# Altium PCB SensorBoard.PcbDoc (part 1 of 5)
Units mm, origin at the board's own origin, x right, y up, seen from the top; angles counter-clockwise.
Board outline 133.86 x 67.84 mm, 4 copper layers (Top Layer, Power Plane, Ground Plane, Bottom Layer), stack 1.586 mm thick; 244 components, 150 nets, 825 pads, 904 vias.
Unrouted connection lines stored in the file: 43.
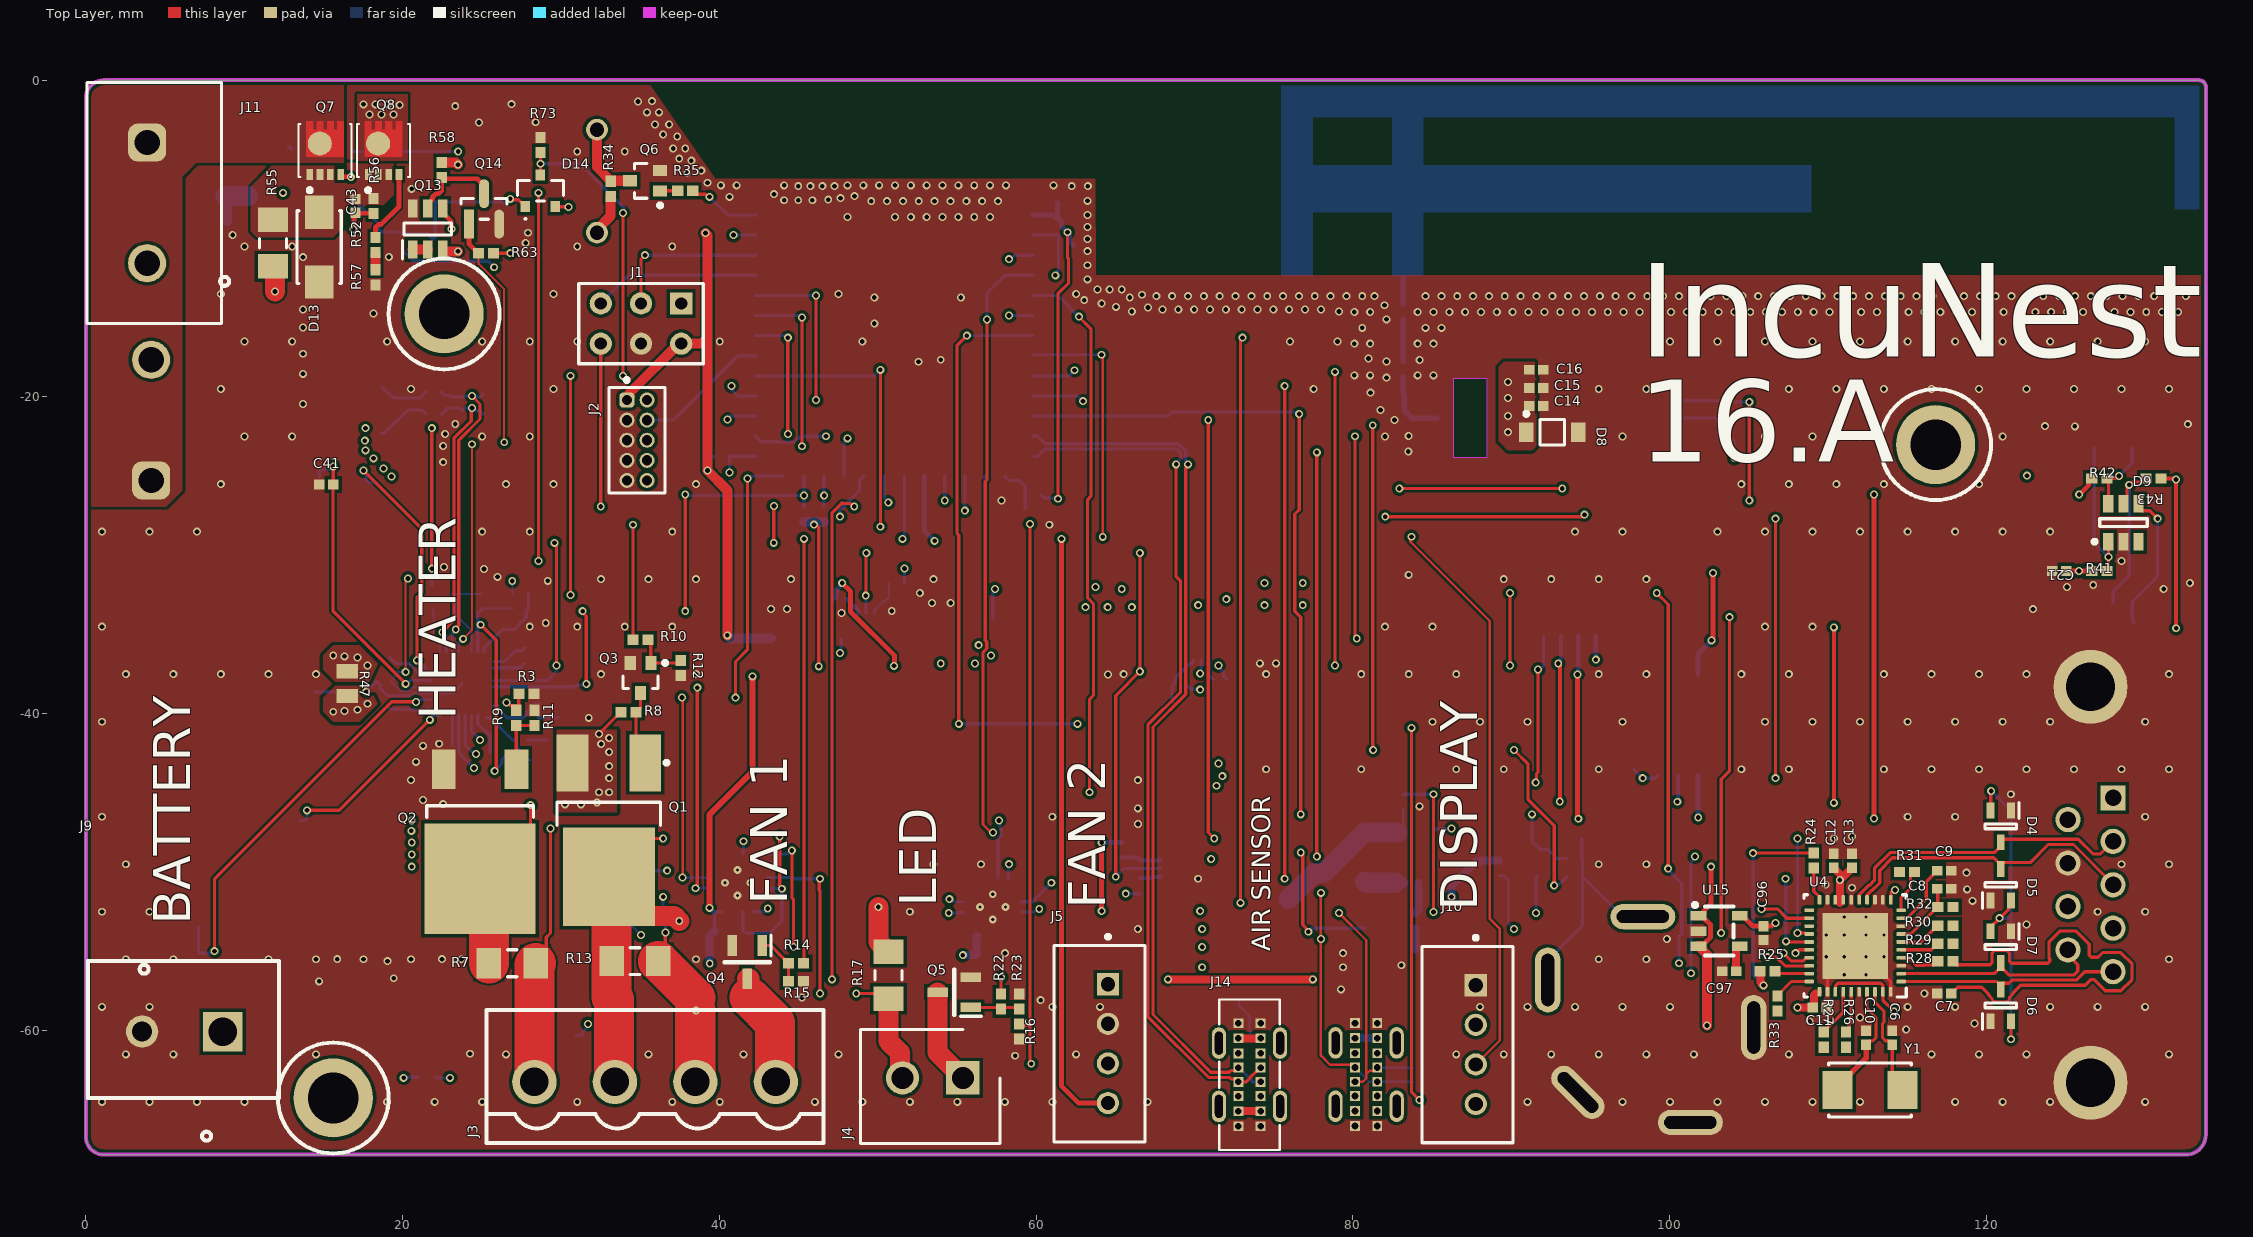
[diagram p0: Top Layer view]
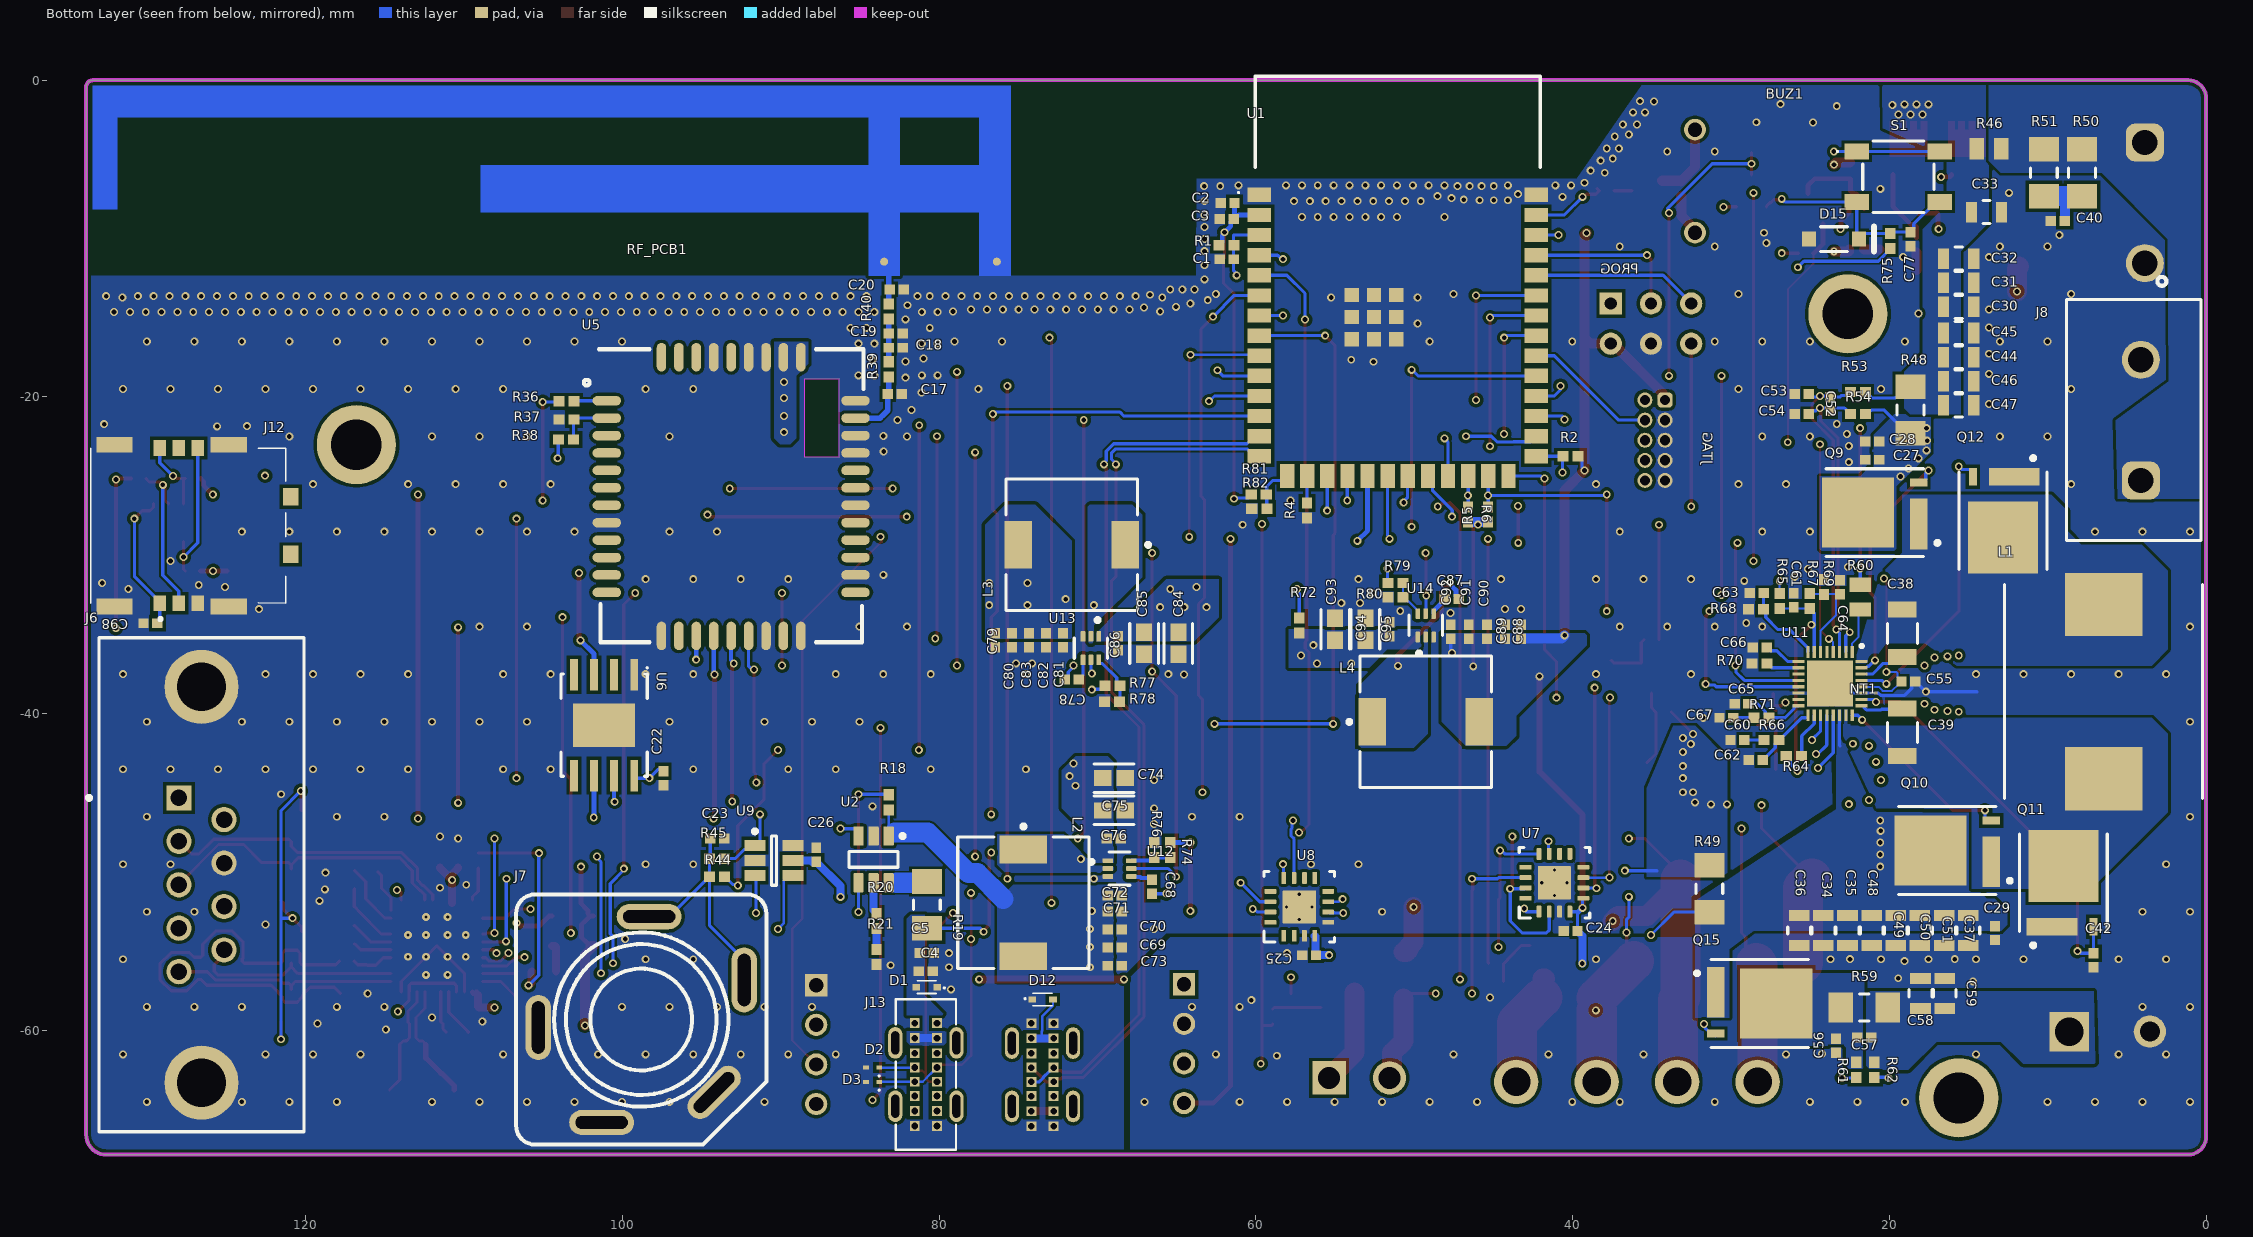
[diagram p1: Bottom Layer view, seen from below]
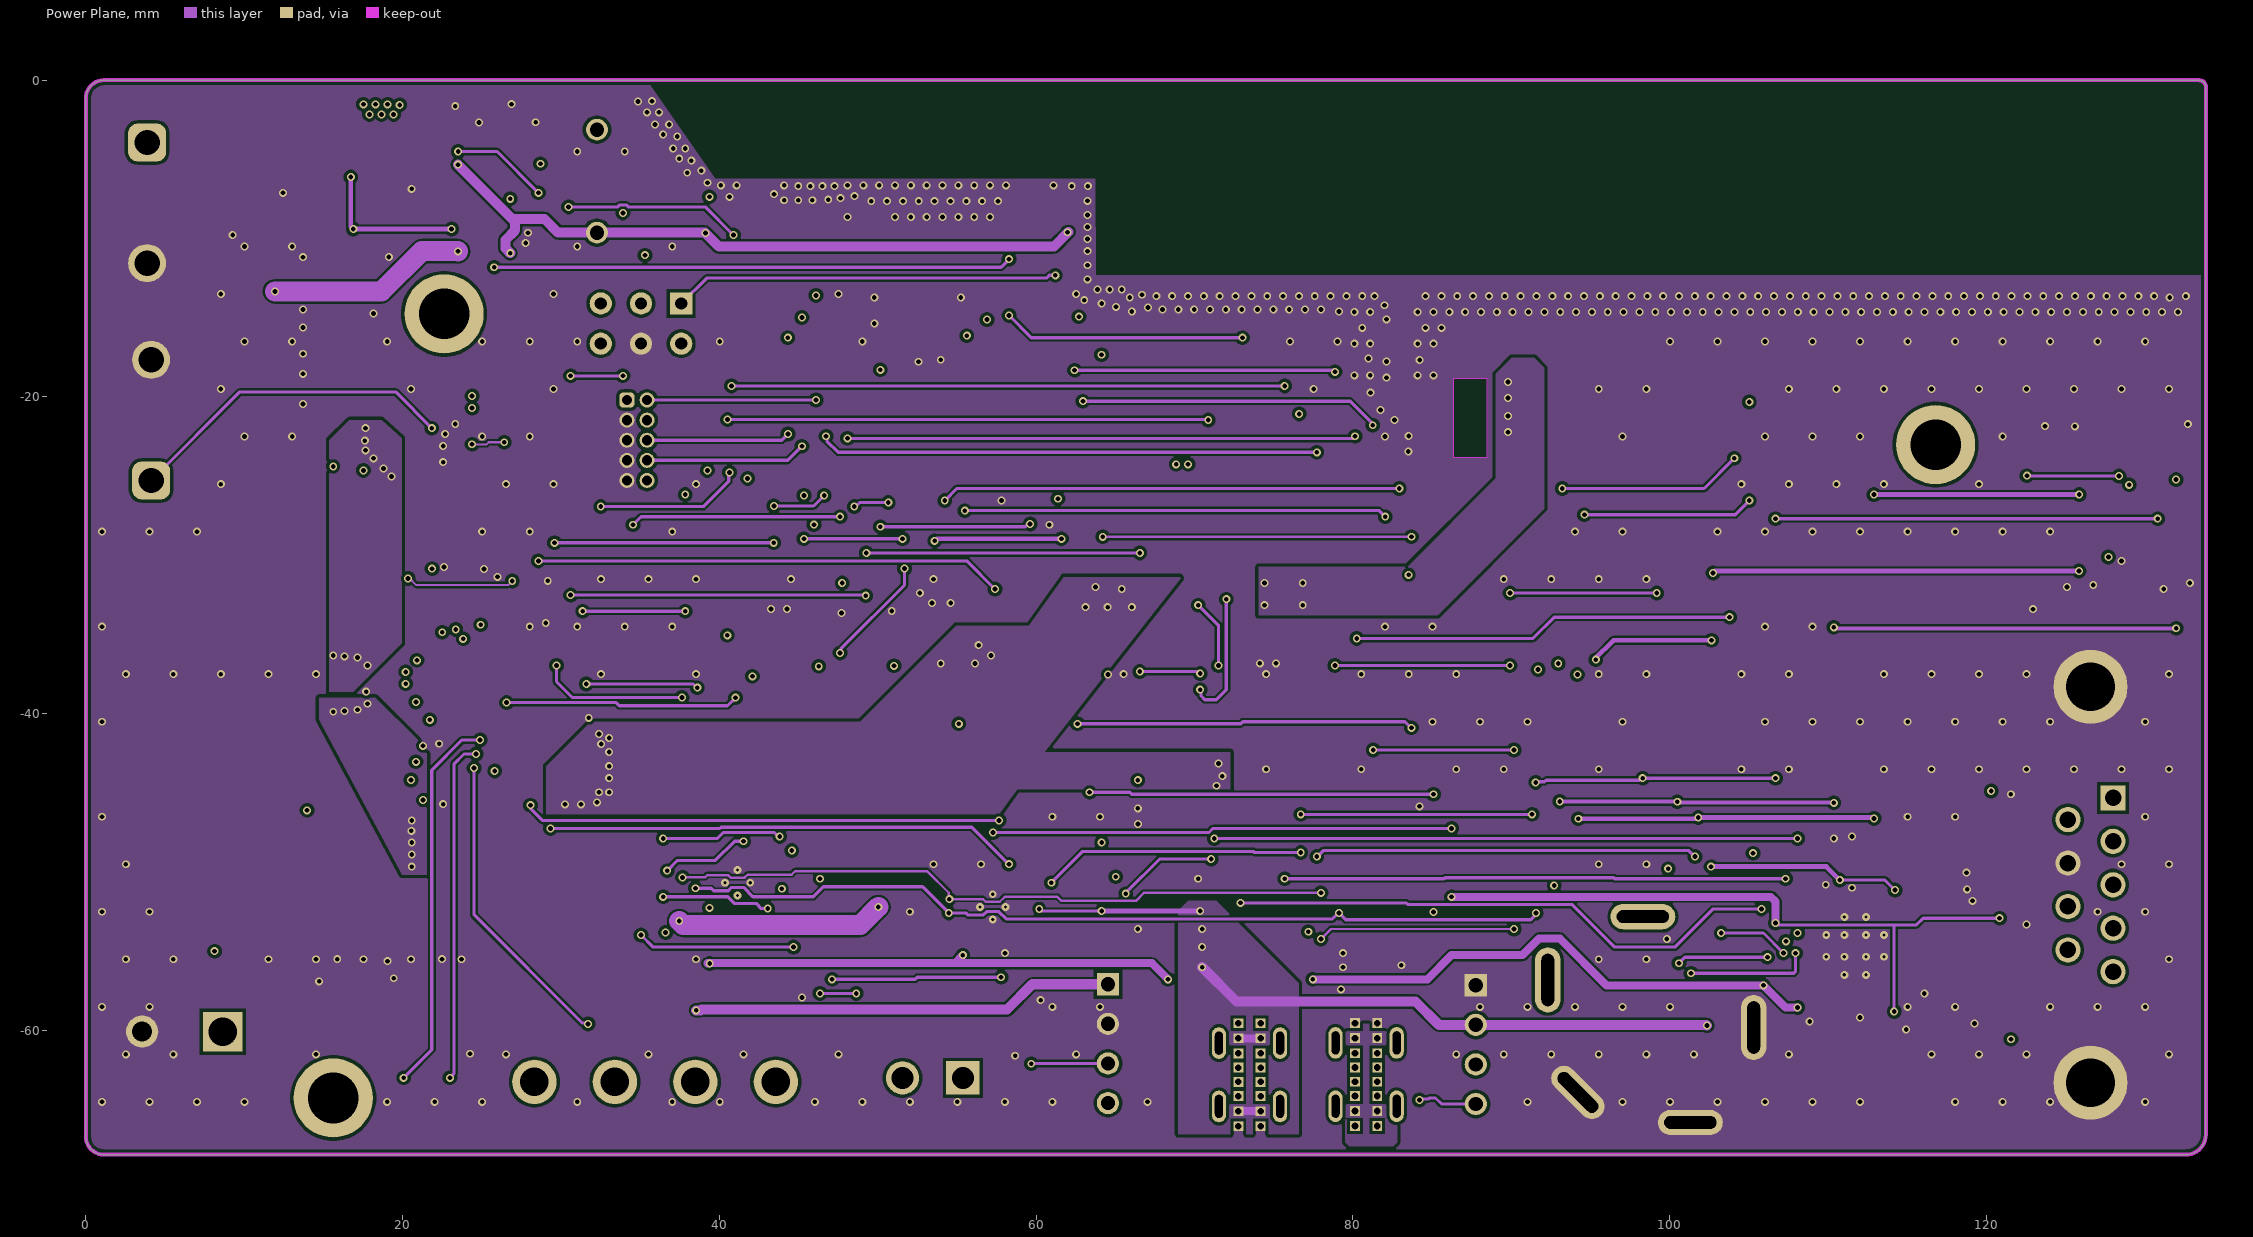
[diagram p2: Power Plane]
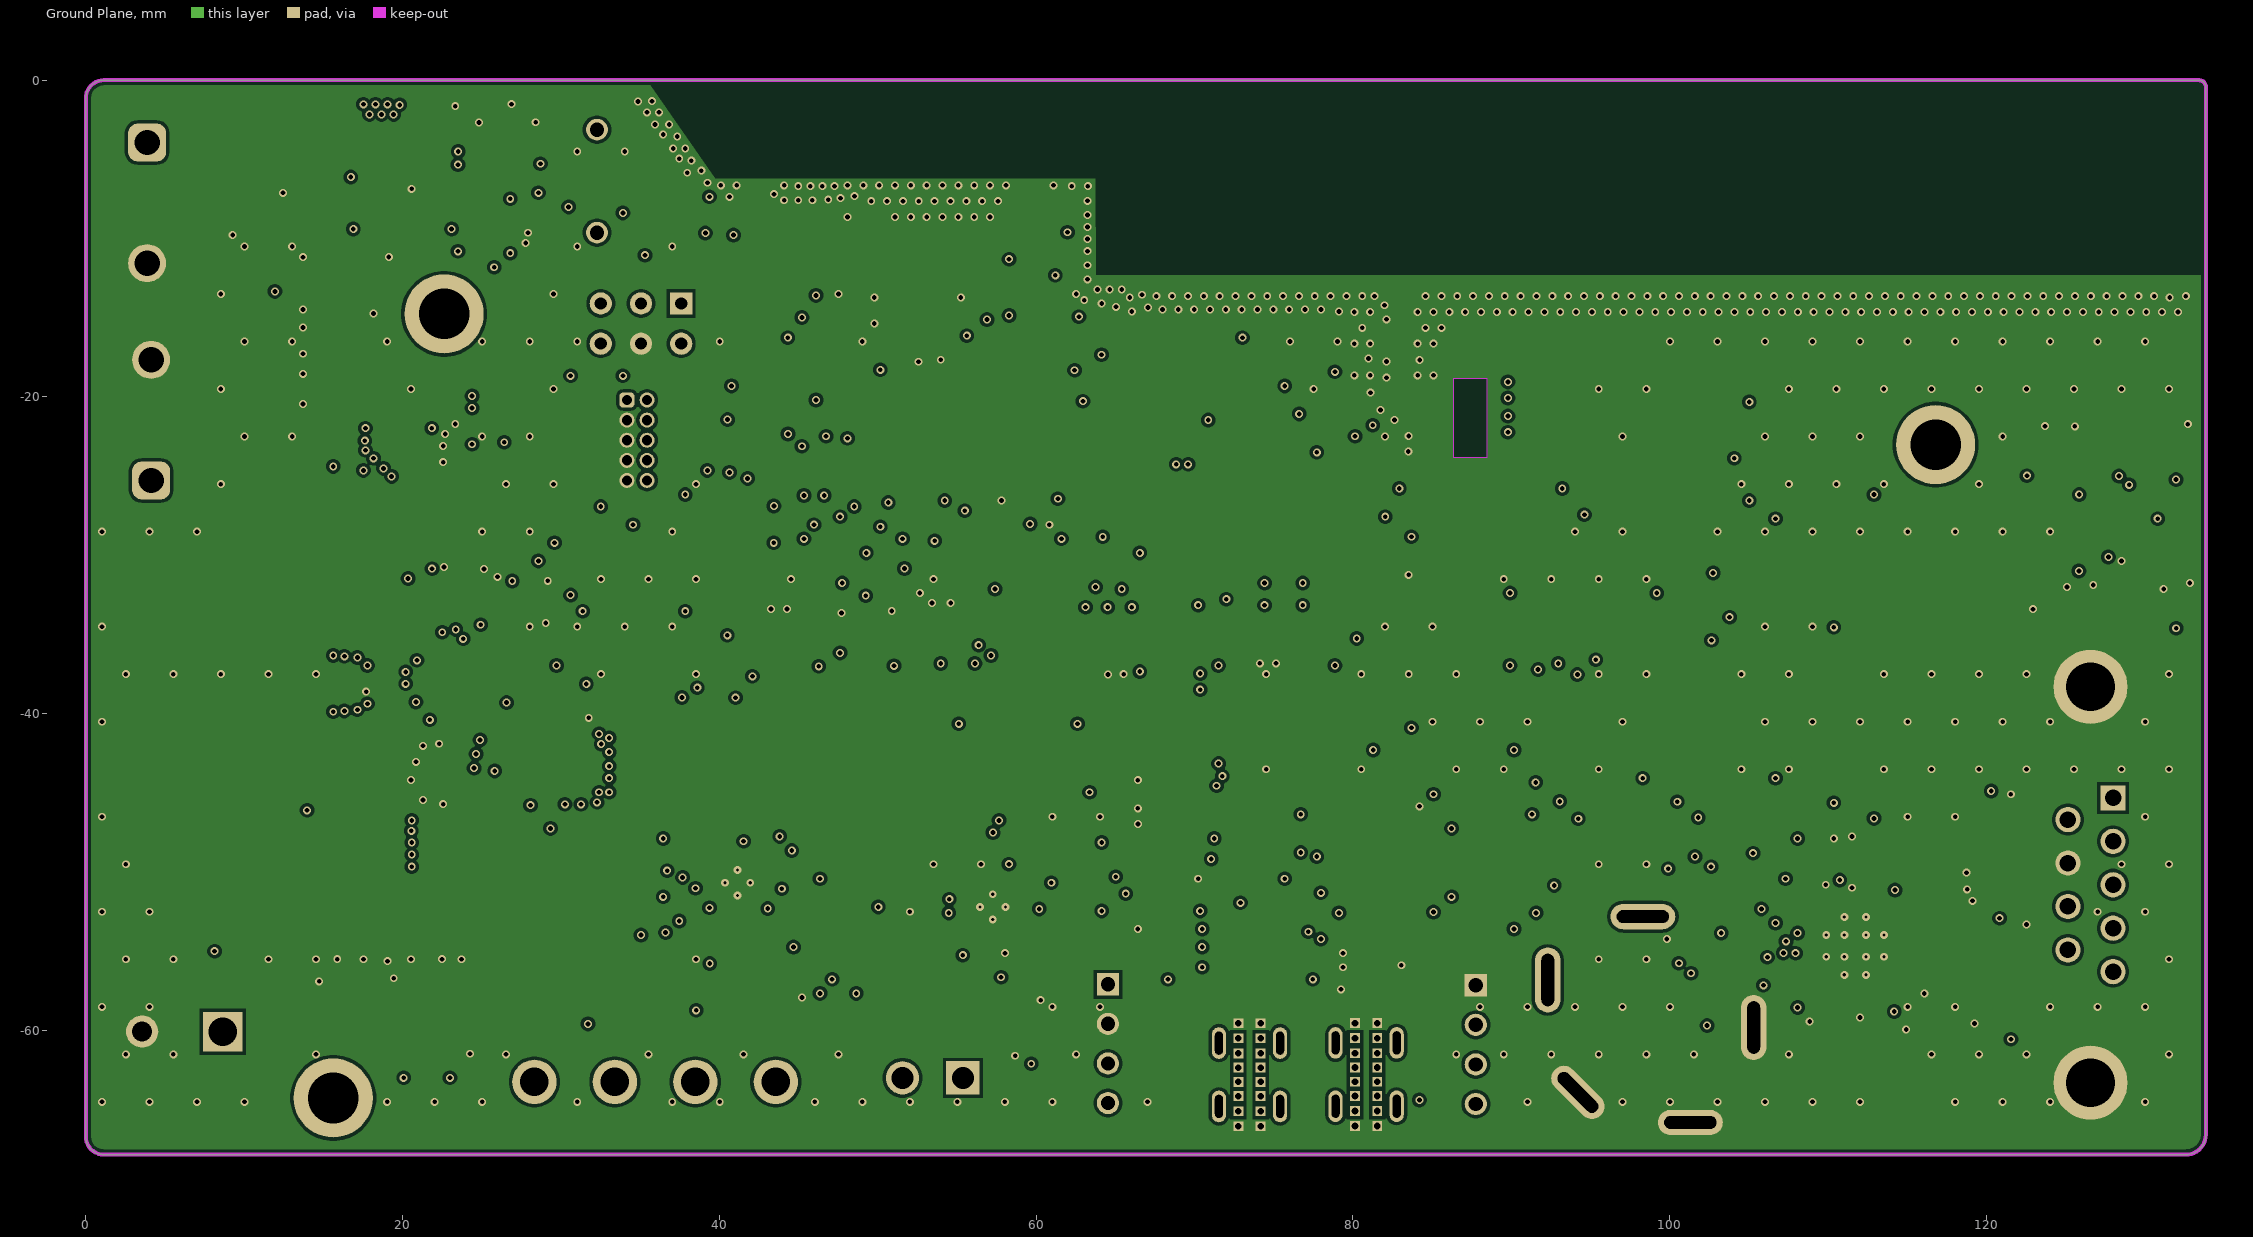
[diagram p3: Ground Plane]
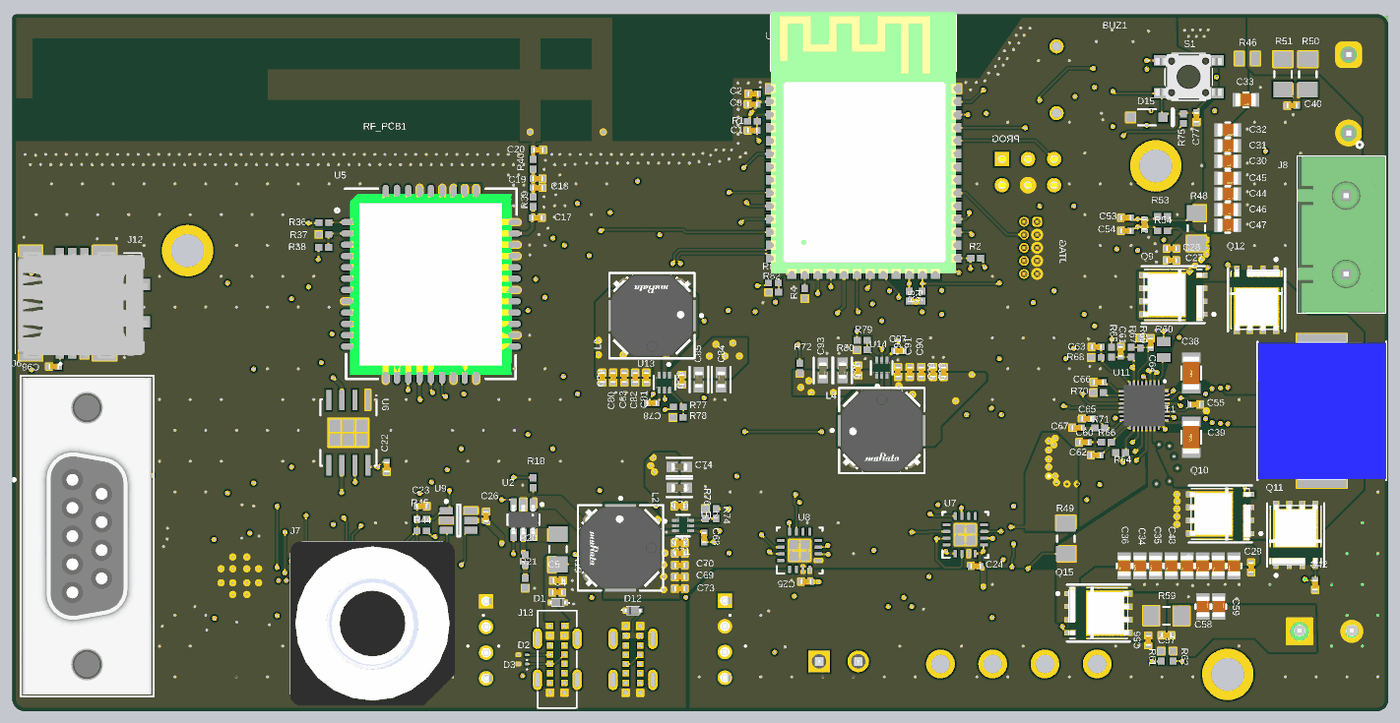
[diagram p6: 3D render of the assembled board from below, using the file's embedded part models]

## Layer stack, top to bottom
Top Solder: solder mask 0.0254, Solder Resist, Dk 3.5
Top Layer: signal copper 0.035
Core1: prepreg 0.2104, FR-4, Dk 3.95
Power Plane: signal copper 0.0152
Core2: core 1.065, FR-4, Dk 3.95
Ground Plane: signal copper 0.0152
Core3: prepreg 0.2104, FR-4, Dk 3.95
Bottom Layer: signal copper 0.035
Bottom Solder: solder mask 0.0254, Solder Resist, Dk 3.5

## Board outline
0,-66.699 0,-1.143 cw(c1.143,-1.143) 1.143,0 133.424,0 cw(c133.424,-0.434) 133.858,-0.434 133.858,-66.572 cw(c132.588,-66.572) 132.588,-67.842 1.143,-67.842 cw(c1.143,-66.699)

## Design rules (kind name [scope] priority, off if disabled: settings)
AssemblyTestPointUsage AssemblyTestPointUsage_1 [All] p2:
AssemblyTestpoint AssemblyTestpoint_1 [All] p2: testpointundercomponent=TRUE minsize=1.016 maxsize=2.54 preferedsize=1.524 minholesize=0 maxholesize=1.016 preferedholesize=0.813 testpointgrid=0.025 usegrid=TRUE gridtolerance=0 allowsidetop=TRUE allowsidebottom=TRUE
Clearance "Board outline clearance" [All vs OnLayer('Keep-Out Layer')] p1: gap=0.2 ignorepadtopadclearanceinfootprint=FALSE except(0: Arc-Hole Track-Hole SMDPad-Hole THPad-Hole Via-Hole Fill-Hole Poly-Hole Region-Hole Text-Hole)
Clearance Clearance_1 [All] p2: gap=0.2 ignorepadtopadclearanceinfootprint=FALSE except(0: Arc-Text Track-Text SMDPad-Text THPad-Text Via-Text Fill-Text Poly-Text Region-Text Text-Text Text-Hole; 0.102: Arc-Arc Arc-Track Arc-SMDPad Track-Track Track-SMDPad; 0.127: Arc-THPad Arc-Via Arc-Fill Arc-Poly Arc-Region Arc-Hole Track-THPad Track-Via Track-Fill Track-Poly Track-Region Track-Hole; 0.152: SMDPad-SMDPad; 0.203: SMDPad-THPad THPad-THPad; 0.254: Via-Via)
ComponentClearance [InComponent('L1')] p1: gap=0 collisioncheckmode=3 verticalgap=0.254 showdistances=FALSE
ComponentClearance UFL [InComponent('RF_CON1')] p2: gap=0 collisioncheckmode=3 verticalgap=0.254 showdistances=FALSE
ComponentClearance ComponentClearance_1 [All] p3: gap=0.254 collisioncheckmode=3 verticalgap=0.254 showdistances=FALSE
DiffPairsRouting DiffPair_USBDiffPairsRouting [InDifferentialPairClass('USB')] p1: maxlimit=0.127 minlimit=0.127 mostfreqgap=0.127 toplayer_minwidth=0.127 toplayer_maxwidth=0.194 toplayer_prefwidth=0.194 midlayer1_minwidth=0.127 midlayer1_maxwidth=0.159 midlayer1_prefwidth=0.159 midlayer2_minwidth=0.127 midlayer2_maxwidth=0.159 midlayer2_prefwidth=0.159 bottomlayer_minwidth=0.127 bottomlayer_maxwidth=0.194 bottomlayer_prefwidth=0.194 impedanceprofiledriven=TRUE impedanceprofileid={170D84A8-33D3-444B-B09E-1C0FCCCC4F91} impedanceprofilevalue=90.000000 maxuncoupledlength=12.7
FabricationTestPointUsage FabricationTestPointUsage_1 [All] p2: valid=0 allowmultiple=FALSE
FabricationTestpoint FabricationTestpoint_1 [All] p2: side=3 testpointundercomponent=TRUE minsize=1.016 maxsize=2.54 preferedsize=1.524 minholesize=0 maxholesize=1.016 preferedholesize=0.813 testpointgrid=0.025 allowsidetop=TRUE allowsidebottom=TRUE usegrid=TRUE gridtolerance=0
FanoutControl Fanout_LCC [IsLCC] p1: bgadir=Out bgaviamode=Centered fanoutstyle=Auto fanoutdirection=Alternating viagrid=0.025 // Fanout_LCC (Default Rule)
FanoutControl Fanout_BGA [IsBGA] p2: bgadir=Out bgaviamode=Centered fanoutstyle=Auto fanoutdirection=Alternating viagrid=0.025 // Fanout_BGA (Default Rule)
FanoutControl Fanout_Small [(CompPinCount < 5)] p3: bgadir=Out bgaviamode=Centered fanoutstyle=Auto fanoutdirection=OutThenIn viagrid=0.025 // Fanout_Small (Default Rule)
FanoutControl Fanout_SOIC [IsSOIC] p4: bgadir=Out bgaviamode=Centered fanoutstyle=Auto fanoutdirection=Alternating viagrid=0.025 // Fanout_SOIC (Default Rule)
FanoutControl Fanout_BGA_1 [IsBGA] p6: bgadir=Out bgaviamode=Centered fanoutstyle=Auto fanoutdirection=Alternating viagrid=0.025 // Fanout_BGA (Default Rule)
FanoutControl Fanout_LCC_1 [IsLCC] p7: bgadir=Out bgaviamode=Centered fanoutstyle=Auto fanoutdirection=Alternating viagrid=0.025 // Fanout_LCC (Default Rule)
FanoutControl Fanout_SOIC_1 [IsSOIC] p8: bgadir=Out bgaviamode=Centered fanoutstyle=Auto fanoutdirection=Alternating viagrid=0.025 // Fanout_SOIC (Default Rule)
FanoutControl Fanout_Small_1 [(CompPinCount < 5)] p9: bgadir=Out bgaviamode=Centered fanoutstyle=Auto fanoutdirection=OutThenIn viagrid=0.025 // Fanout_Small (Default Rule)
FanoutControl Fanout_Default_1 [All] p10: bgadir=Out bgaviamode=Centered fanoutstyle=Auto fanoutdirection=Alternating viagrid=0.025 // Fanout_Default (Default Rule)
Height Height_1 [All] p1: minheight=0 maxheight=50 prefheight=12.7
HoleSize HoleSize_1 [All] p1: absolutevalues=TRUE maxlimit=15 minlimit=0.2 maxpercent=80.000 minpercent=20.000
HoleToHoleClearance u8 [All vs InComponent('u8_1')] p1: gap=0 allowstackedmicrovias=TRUE
HoleToHoleClearance [All] p2: gap=0.254 allowstackedmicrovias=TRUE
LayerPairs LayerPairs_1 [All] p1: enforce=TRUE
MatchedLengths DiffPair_USBMatchedLengths [InDifferentialPairClass('USB')] p1: tolerance=25.4 checknetsindiffpair=FALSE checkdiffpairvsdiffpair=TRUE checkxsignals=TRUE checkothers=TRUE
MinimumAnnularRing [All] p1: minimumring=0.09
MinimumSolderMaskSliver MinimumSolderMaskSliver_1 [All] p1 off: minsoldermaskwidth=0.2
NetAntennae NetAntennae_1 [All] p2: netantennaetolerance=0
PasteMaskExpansion PasteMaskExpansion_1 [All] p2: expansion=0
PlaneClearance PlaneClearance_1 [All] p1: clearance=0.508
PlaneConnect PlaneConnect_1 [All] p1: planeconnectstyle=Direct reliefexpansion=0.508 reliefentries=4 reliefconductorwidth=0.7 reliefairgap=0.254
PolygonConnect Power [All] p1: connectstyle=Direct reliefconductorwidth=2.54 reliefentries=4 polygonreliefangle="90 Angle" airgapwidth=0.254
PolygonConnect Via [IsVia] p2: connectstyle=Direct reliefconductorwidth=0.254 reliefentries=4 polygonreliefangle="90 Angle" airgapwidth=0.254
PolygonConnect [All] p3: connectstyle=Direct reliefconductorwidth=0.508 reliefentries=4 polygonreliefangle="90 Angle" airgapwidth=0.254
RoutingCorners RoutingCorners_1 [All] p2: cornerstyle=45-Degree minsetback=2.54 maxsetback=2.54
RoutingLayers RoutingLayers_1 [All] p2: top layer_v5=TRUE mid layer 1_v5=TRUE mid layer 2_v5=TRUE bottom layer_v5=TRUE
RoutingPriority RoutingPriority_1 [All] p2: routingpriority=0
RoutingTopology RoutingTopology_1 [All] p2: topology=Shortest
RoutingVias RoutingVias_1 [All] p1: holewidth=0.3 width=0.5 viastyle="Through Hole" minholewidth=0.2 minwidth=0.4 maxholewidth=0.711 maxwidth=1.27
ShortCircuit ShortCircuit_Grounds [InNet('PGND') vs InNet('DGND')] p1: allowed=TRUE
ShortCircuit ShortCircuit_Antenna [InNet('NetC20_2')] p2: allowed=TRUE
ShortCircuit [All] p3: allowed=FALSE
SilkToBoardRegionClearance SilkToBoardRegionClearance_1 [InNet('No Net')] p2 off:
SilkToSilkClearance SilkToSilkClearance_1 [All] p1: silktosilkclearance=0
SilkToSolderMaskClearance SilkToSolderMaskClearance_1 [IsPad] p1: minsilkscreentomaskgap=0 clearancetoexposedcopper=TRUE
SolderMaskExpansion [All] p1: expansion=0.102 istentingtop=FALSE
SolderMaskExpansion SolderMaskExpansion_1 [All] p2: expansion=0.102 istentingtop=FALSE
SupplyNets "Schematic Supply Nets_2" [InNet('Vsense+')] p1: voltage=0.000
SupplyNets "Schematic Supply Nets_13" [InNet('4V@2A')] p2: voltage=0.000
SupplyNets "Schematic Supply Nets_12" [InNet('DC_ACTUATORS')] p3: voltage=0.000
SupplyNets "Schematic Supply Nets_11" [InNet('V_SYS')] p4: voltage=0.000
SupplyNets "Schematic Supply Nets_10" [InNet('DGND')] p5: voltage=0.000
SupplyNets "Schematic Supply Nets_9" [InNet('3v3_dig@2A')] p6: voltage=0.000
SupplyNets "Schematic Supply Nets_8" [InNet('V_BAT')] p7: voltage=0.000
SupplyNets "Schematic Supply Nets_7" [InNet('VUSB')] p8: voltage=0.000
SupplyNets "Schematic Supply Nets_6" [InNet('3v3_ANA@250mA')] p9: voltage=0.000
SupplyNets "Schematic Supply Nets_5" [InNet('V_IN')] p10: voltage=0.000
SupplyNets "Schematic Supply Nets_4" [InNet('V_DDA')] p11: voltage=0.000
SupplyNets "Schematic Supply Nets_3" [InNet('5V@2A')] p12: voltage=0.000
SupplyNets "Schematic Supply Nets" [InNet('V_BUS')] p13: voltage=0.000
UnRoutedNet UnRoutedNet_1 [All] p1:
UnpouredPolygon UnpouredPolygon_1 [All] p2:
Width Width_GSM_ANTENNA_1 [InNet('NetC17_2') or InNet('NetC18_2') or InNet('NetC20_2')] p1: maxlimit=0.35 minlimit=0.35 preferedwidth=0.35
Width Width_1 [All] p2: maxlimit=8 minlimit=0.1 preferedwidth=0.2
13 further rules are at their usual default settings.

## Classes and differential pairs
component class U_Display: J10
differential pair class USB: D
component class U_Power_Input: C27 C28 C29 C30 C31 C32 C33 C34 C35 C36 C37 C38 C39 C40 C41 C42 C43 C44 C45 C46 C47 C48 C49 C50 C51 C52 C53 C54 C55 C56 C57 C58 C59 C60 C61 C62 C63 C64 C65 C66 C67 D13 J8 J9 J11 L1 NT1 Q7 Q8 Q9 Q10 Q11 Q12 Q13 Q14 Q15 R46 R47 R48 R49 R50 R51 R52 R53 R54 R55 R56 R57 R58 R59 R60 R61 R62 R63 R64 R65 R66 R67 R68 R69 R70 R71 U11
component class U_GSM: C14 C15 C16 C17 C18 C19 C20 C21 C22 C98 D8 D9 D22 D23 D24 J12 R36 R37 R38 R39 R40 R41 R42 R43 RF_PCB1 U5 U6
differential pair class AFE: IN TX
net class GPRS_RF: NetC17_2 NetC18_2 NetC20_2
component class U_Buzzer: BUZ1 Q6 R34 R35
component class U_AFE: C6 C7 C8 C9 C10 C11 C12 C13 D4 D5 D6 D7 D22 J6 R24 R25 R26 R27 R28 R29 R30 R31 R32 R33 U4 Y1
component class U_Actuators: C4 C5 D1 D2 D3 D20 D21 J3 J4 J5 J13 Q1 Q2 Q3 Q4 Q5 R7 R8 R9 R10 R11 R12 R13 R14 R15 R16 R17 R18 R19 R20 R21 R22 R23 SW1 U2
component class U_sensors: 1 2 3 4 AGND1 C23 C24 C25 C26 D12 DGND1 J7 J14 R44 R45 U7 U8 U9 U18
component class U_power: C68 C69 C70 C71 C72 C73 C74 C75 C76 C77 C78 C79 C80 C81 C82 C83 C84 C85 C86 C87 C88 C89 C90 C91 C92 C93 C94 C95 C96 C97 D14 D15 L2 L3 L4 R72 R73 R74 R75 R76 R77 R78 R79 R80 S1 U12 U13 U14 U15
component class U_uC: C1 C2 C3 J1 J2 R1 R2 R3 R4 R5 R6 R81 R82 U1
differential pair D: +D_P -D_N
differential pair TX: +TX_P -TX_N
differential pair IN: +IN_P -IN_N

## Components (designator, comment, footprint, x,y, rotation, side; value= is the part's Value field where it differs from the comment)
BUZ1 "CUI CMT-1285C-035" BUZZER-12MM-NS 32.273,-6.374 r270 bottom
C1 "1uF 0402 X5R 50V" CAPC1005X55X25NL5T10 61.849,-11.303 r180 bottom
C2 "10uF 0402 X5R 10V" CAPC1005X55X25NL5T10 61.79,-7.747 r180 bottom
C3 "100nF 0402 X7R 50V" CAPC1005X55X25NL5T10 61.849,-8.763 r180 bottom
C4 "10uF 0402 X5R 10V" CAPC1005X55X25NL5T10 80.831,-56.261 r0 bottom
C5 "10uF 0402 X5R 10V" CAPC1005X55X25NL5T10 80.772,-55.118 r0 bottom
C6 "18pF 0402 X5R 50V" CAPC1005X55X25NL5T10 114.049,-60.455 r270 top
C7 "10nF 0402 X7R 50V" CAPC1005X55X25NL5T10 117.348,-57.658 r0 top
C8 "2.2uF 0402 X5R 25V" CAPC1005X55X25NL5T10 117.348,-51.057 r180 top
C9 "2.2uF 0402 X5R 25V" CAPC1005X55X25NL5T10 117.348,-49.914 r180 top
C10 "18pF 0402 X5R 50V" CAPC1005X55X25NL5T10 112.398,-60.455 r270 top
C11 "100nF 0402 X7R 50V" CAPC1005X55X25NL5T10 109.474,-58.547 r180 top
C12 "100nF 0402 X7R 50V" CAPC1005X55X25NL5T10 110.363,-49.276 r270 top
C13 "1uF 0402 X5R 50V" CAPC1005X55X25NL5T10 111.509,-49.279 r270 top
C14 "10uF 0402 X5R 10V" CAPC1005X55X25NL5T10 91.567,-20.574 r180 top
C15 "100nF 0402 X7R 50V" CAPC1005X55X25NL5T10 91.567,-19.431 r180 top
C16 "18pF 0402 X5R 50V" CAPC1005X55X25NL5T10 91.567,-18.288 r180 top
C17 "100nF 0402 X7R 50V" CAPC1005X55X25NL5T10 82.804,-19.812 r0 bottom
C18 "100nF 0402 X7R 50V" CAPC1005X55X25NL5T10 82.745,-16.891 r0 bottom
C19 "100nF 0402 X7R 50V" CAPC1005X55X25NL5T10 82.745,-16.002 r0 bottom
C20 "100nF 0402 X7R 50V" CAPC1005X55X25NL5T10 82.677,-13.208 r0 bottom
C21 "18pF 0402 X5R 50V" CAPC1005X55X25NL5T10 124.587,-30.988 r0 top
C22 "100nF 0402 X7R 50V" CAPC1005X55X25NL5T10 97.409,-44.069 r90 bottom
C23 "100nF 0402 X7R 50V" CAPC1005X55X25NL5T10 94.014,-47.879 r0 bottom
C24 "100nF 0402 X7R 50V" CAPC1005X55X25NL5T10 40.132,-53.721 r180 bottom
C25 "100nF 0402 X7R 50V" CAPC1005X55X25NL5T10 56.642,-55.245 r180 bottom
C26 "100nF 0402 X7R 50V" CAPC1005X55X25NL5T10 87.757,-48.895 r270 bottom
C27 "10nF 0402 X7R 50V" CAPC1005X55X25NL5T10 21.087,-23.962 r180 bottom
C28 "1nF 0402 X7R 50V" CAPC1005X55X25NL5T10 21.09,-22.818 r180 bottom
C29 "10nF 0402 X7R 50V" CAPC1005X55X25NL5T10 13.335,-53.848 r90 bottom
C30 "10uF 0805 X5R 50V" FP-GRM21B-0_2-e0_2_0_7-MFG 15.621,-14.314 r180 bottom
C31 "10uF 0805 X5R 50V" FP-GRM21B-0_2-e0_2_0_7-MFG 15.621,-12.79 r180 bottom
C32 "10uF 0805 X5R 50V" FP-GRM21B-0_2-e0_2_0_7-MFG 15.621,-11.266 r180 bottom
C33 "10uF 0805 X5R 50V" FP-GRM21B-0_2-e0_2_0_7-MFG 13.867,-8.33 r180 bottom
C34 "10uF 0805 X5R 50V" FP-GRM21B-0_2-e0_2_0_7-MFG 24.167,-53.692 r270 bottom
C35 "10uF 0805 X5R 50V" FP-GRM21B-0_2-e0_2_0_7-MFG 22.643,-53.692 r270 bottom
C36 "10uF 0805 X5R 50V" FP-GRM21B-0_2-e0_2_0_7-MFG 25.691,-53.692 r270 bottom
C37 "10uF 0805 X5R 50V" FP-GRM21B-0_2-e0_2_0_7-MFG 15.023,-53.692 r270 bottom
C38 "47nF 1206 X7R 50V" FP-CC1206-FD-MFG 19.177,-34.925 r270 bottom
C39 "47nF 1206 X7R 50V" FP-CC1206-FD-MFG 19.177,-41.172 r90 bottom
C40 "1uF 0402 X5R 50V" CAPC1005X55X25NL5T10 9.359,-8.89 r180 bottom
C41 "150pF 0402 X7R 50V" CAPC1005X55X25NL5T10 15.172,-25.527 r0 top
C42 "150pF 0402 X7R 50V" CAPC1005X55X25NL5T10 7.112,-55.558 r90 bottom
C43 "100nF 0402 X7R 50V" CAPC1005X55X25NL5T10 17.018,-7.942 r90 top
C44 "10uF 0805 X5R 50V" FP-GRM21B-0_2-e0_2_0_7-MFG 15.621,-17.489 r180 bottom
C45 "10uF 0805 X5R 50V" FP-GRM21B-0_2-e0_2_0_7-MFG 15.621,-15.965 r180 bottom
C46 "10uF 0805 X5R 50V" FP-GRM21B-0_2-e0_2_0_7-MFG 15.621,-19.013 r180 bottom
C47 "10uF 0805 X5R 50V" FP-GRM21B-0_2-e0_2_0_7-MFG 15.621,-20.537 r180 bottom
C48 "10uF 0805 X5R 50V" FP-GRM21B-0_2-e0_2_0_7-MFG 21.119,-53.692 r270 bottom
C49 "10uF 0805 X5R 50V" FP-GRM21B-0_2-e0_2_0_7-MFG 19.595,-53.692 r270 bottom
C50 "10uF 0805 X5R 50V" FP-GRM21B-0_2-e0_2_0_7-MFG 18.071,-53.692 r270 bottom
C51 "10uF 0805 X5R 50V" FP-GRM21B-0_2-e0_2_0_7-MFG 16.547,-53.692 r270 bottom
C52 "10nF 0402 X7R 50V" CAPC1005X55X25NL5T10 23.749,-20.447 r90 bottom
C53 "33nF 0402 X7R 50V" CAPC1005X55X25NL5T10 25.527,-19.812 r0 bottom
C54 "33nF 0402 X7R 50V" CAPC1005X55X25NL5T10 25.527,-21.082 r0 bottom
C55 "2.2uF 0402 X5R 25V" CAPC1005X55X25NL5T10 18.796,-37.973 r0 bottom
C56 "1uF 0402 X5R 50V" CAPC1005X55X25NL5T10 23.368,-60.96 r90 bottom
C57 "100nF 0402 X7R 50V" CAPC1005X55X25NL5T10 21.59,-60.452 r0 bottom
C58 "10uF 0805 X5R 50V" FP-GRM21B-0_2-e0_2_0_7-MFG 18.034,-57.658 r90 bottom
C59 "10uF 0805 X5R 50V" FP-GRM21B-0_2-e0_2_0_7-MFG 16.51,-57.658 r90 bottom
C60 "680pF 0402 X5R 50V" CAPC1005X55X25NL5T10 29.591,-41.656 r180 bottom
C61 "1uF 0402 X5R 50V" CAPC1005X55X25NL5T10 26.035,-32.834 r270 bottom
C62 "15pF 0402 X5R 50V" CAPC1005X55X25NL5T10 28.448,-42.926 r180 bottom
C63 "100pF 0402 X7R 50V" CAPC1005X55X25NL5T10 28.382,-32.385 r0 bottom
C64 "100pF 0402 X7R 50V" CAPC1005X55X25NL5T10 23.114,-32.004 r90 bottom
C65 "33pF 0402 X7R 50V" CAPC1005X55X25NL5T10 29.337,-39.37 r0 bottom
C66 "100pF 0402 X7R 50V" CAPC1005X55X25NL5T10 28.194,-35.814 r0 bottom
C67 "4.7 uF 0402 X7R 50V" CAPC1005X55X25NL5T10 30.285,-40.259 r0 bottom
C68 "100nF 0402 X7R 50V" CAPC1005X55X25NL5T10 66.548,-50.927 r90 bottom
C69 "10uF 0402 X5R 10V" CAPC1005X55X25NL5T10 68.915,-54.77 r0 bottom
C70 "10uF 0402 X5R 10V" CAPC1005X55X25NL5T10 68.915,-53.627 r0 bottom
C71 "10uF 0402 X5R 10V" CAPC1005X55X25NL5T10 68.915,-52.484 r0 bottom
C72 "10uF 0402 X5R 10V" CAPC1005X55X25NL5T10 68.915,-51.468 r0 bottom
C73 "100nF 0402 X7R 50V" CAPC1005X55X25NL5T10 68.915,-55.913 r0 bottom
C74 "10uF 0603 X5R 25V" FP-GRM188-0_2-IPC_B 68.961,-44.069 r0 bottom
C75 "10uF 0603 X5R 25V" FP-GRM188-0_2-IPC_B 68.961,-46.101 r0 bottom
C76 "100nF 0402 X7R 50V" CAPC1005X55X25NL5T10 68.961,-47.879 r0 bottom
C77 "100nF 0402 X7R 50V" CAPC1005X55X25NL5T10 18.669,-10.033 r90 bottom
C78 "100nF 0402 X7R 50V" CAPC1005X55X25NL5T10 71.628,-37.846 r180 bottom
C79 "10uF 0402 X5R 10V" CAPC1005X55X25NL5T10 76.454,-35.365 r90 bottom
C80 "10uF 0402 X5R 10V" CAPC1005X55X25NL5T10 75.387,-35.365 r90 bottom
C81 "10uF 0402 X5R 10V" CAPC1005X55X25NL5T10 72.187,-35.365 r90 bottom
C82 "10uF 0402 X5R 10V" CAPC1005X55X25NL5T10 73.254,-35.365 r90 bottom
C83 "100nF 0402 X7R 50V" CAPC1005X55X25NL5T10 74.321,-35.365 r90 bottom
C84 "10uF 0603 X5R 25V" FP-GRM188-0_2-IPC_B 64.897,-35.56 r90 bottom
C85 "10uF 0603 X5R 25V" FP-GRM188-0_2-IPC_B 67.056,-35.56 r90 bottom
C86 "100nF 0402 X7R 50V" CAPC1005X55X25NL5T10 68.707,-35.56 r90 bottom
C87 "100nF 0402 X7R 50V" CAPC1005X55X25NL5T10 47.625,-32.766 r0 bottom
C88 "10uF 0402 X5R 10V" CAPC1005X55X25NL5T10 43.256,-34.823 r270 bottom
C89 "10uF 0402 X5R 10V" CAPC1005X55X25NL5T10 44.272,-34.823 r270 bottom
C90 "10uF 0402 X5R 10V" CAPC1005X55X25NL5T10 45.415,-34.823 r270 bottom
C91 "10uF 0402 X5R 10V" CAPC1005X55X25NL5T10 46.558,-34.823 r270 bottom
C92 "100nF 0402 X7R 50V" CAPC1005X55X25NL5T10 47.701,-34.823 r270 bottom
C93 "10uF 0603 X5R 25V" FP-GRM188-0_2-IPC_B 54.991,-34.671 r270 bottom
C94 "10uF 0603 X5R 25V" FP-GRM188-0_2-IPC_B 53.086,-34.671 r270 bottom
C95 "100nF 0402 X7R 50V" CAPC1005X55X25NL5T10 51.562,-34.671 r270 bottom
C96 "1uF 0402 X5R 50V" CAPC1005X55X25NL5T10 105.918,-53.848 r90 top
C97 "1uF 0402 X5R 50V" CAPC1005X55X25NL5T10 103.759,-56.261 r0 top
C98 "100nF 0402 X7R 50V" CAPC1005X55X25NL5T10 129.794,-34.29 r180 bottom
D1 "LESD5D5.0CT1G" LESD5D50CT1G 80.772,-57.266 r0 bottom
D2 "ESD9B3.3ST5G" ONSC-SOD-923-2-514AB-01_V 84.201,-62.346 r0 bottom
D3 "ESD9B3.3ST5G" ONSC-SOD-923-2-514AB-01_V 84.201,-63.246 r0 bottom
D4 "BAV99W-7-F" SOT65P210X110-3N 120.904,-47.117 r270 top
D5 "BAV99W-7-F" SOT65P210X110-3N 120.904,-50.8 r90 top
D6 "BAV99W-7-F" SOT65P210X110-3N 120.904,-58.42 r90 top
D7 "BAV99W-7-F" SOT65P210X110-3N 120.904,-54.737 r270 top
D8 "MMSZ5231BT1G" ONSC-SOD-123-2-425-04_V 92.583,-22.225 r0 top
D9 "ESDA6V1-5SC6" MF06A_N 128.651,-27.94 r90 top
D12 "LESD5D5.0CT1G" LESD5D50CT1G 73.471,-58.046 r180 bottom
D13 "SMAJ26CA" FP-SMAJ-CA-MFG 14.732,-10.541 r90 top
D14 "BAT54C" NXP-SOT23-3_V 28.702,-6.985 r180 top
D15 "BZT52C3V0-7-F" DIOD-SOD123_V 23.495,-10.033 r180 bottom
J1 "Samtec SLW-103-01-T-D" PCB-37z8hw1ej4f71bosen9e-1 37.592,-14.097 r270 top
J2 "62201021121" 62201021121 34.798,-22.733 r270 top
J3 "KF2EDGVC-5.08-4P" CONN-TH_4P-P5.08_KF2EDGVC-5.08-4P 35.941,-63.246 r180 top
J4 "WJ15EDGVC-3.81-2P" SHDR2W85P0X381_1X2_850X700X935P 55.372,-62.992 r180 top
J5 "B4B-XH-A(LF)(SN)" FP-B4B-XH-A_LF_SN-MFG 64.008,-60.833 r90 top
J6 "2-5747706-0" FP-2-5747706-0-MFG 126.571,-50.8 r90 bottom
J7 "PJ-612" AUDIO-TH_PJ-612 98.806,-59.309 r90 bottom
J8 "691311400102" 691311400102 4.572,-21.463 r90 bottom
J9 "Degson 2EDGK-5.08-02P-14-00AH" PCB-h4cyb3wxd4gf7j132tzl-1 6.096,-60.071 r180 top
J10 "B4B-XH-A(LF)(SN)" FP-B4B-XH-A_LF_SN-MFG 87.232,-60.893 r90 top
J11 "691311400102" 691311400102 4.318,-7.747 r270 top
J12 "1042240820" 1042240820 127,-28.321 r270 bottom
J13 "TYPE-C 16PLC-H10.0" TYPE-C-TH_16PLC-H10.0 80.834,-62.785 r90 bottom
J14 "TYPE-C 16PLC-H10.0" TYPE-C-TH_16PLC-H10.0 73.471,-62.796 r90 top
L1 "SRP1265A-3R3M" INDPM135125X650N 6.477,-38.608 r270 bottom
L2 "1217AS-H-3R3N=P3" FP-DEM8045C-MFG 74.676,-51.943 r270 bottom
L3 "1217AS-H-3R3N=P3" FP-DEM8045C-MFG 71.628,-29.337 r0 bottom
L4 "1217AS-H-3R3N=P3" FP-DEM8045C-MFG 49.276,-40.513 r180 bottom
NT1 "NetTie_SMD" NETTIE_SMD 21.876,-38.7 r0 bottom net-tie
Q1 "IPD90P03P404ATMA1" "DPAK IPD90P03P404ATMA1" 33.02,-47.498 r270 top
Q2 "IRLR7843TRPBF" FP-PG-TO252-3-MFG 24.892,-48.094 r180 top
Q3 "BSS138W-7-F" DIOD-SOT323-3_V 35.02,-37.74 r270 top
Q4 "IRLML6244TRPBF" SOT95P237X112-3N 41.749,-55.687 r270 top
Q5 "IRLML6244TRPBF" SOT95P237X112-3N 54.83,-57.597 r180 top
Q6 "BSS138W-7-F" DIOD-SOT323-3_V 35.306,-6.35 r180 top
Q7 "DMP4013LFG-7" POWERDI3333-8_MFG 15.113,-4.445 r0 top
Q8 "DMP4013LFG-7" POWERDI3333-8_MFG 18.796,-4.445 r0 top
Q9 "BSC059N04LS6ATMA1" FP-PG-TDSON-8-MFG 20.921,-27.305 r90 bottom
Q10 "BSC059N04LS6ATMA1" FP-PG-TDSON-8-MFG 16.349,-48.641 r90 bottom
Q11 "BSC059N04LS6ATMA1" FP-PG-TDSON-8-MFG 9.017,-50.673 r180 bottom
Q12 "BSC059N04LS6ATMA1" FP-PG-TDSON-8-MFG 12.827,-27.813 r0 bottom
Q13 "DCX124EK-7-F" SOT95P285X140-6N 21.59,-9.398 r90 top
Q14 "2N7002ET1G" FP-318-08-IPC_A 25.146,-8.128 r90 top
Q15 "AON6407" FP-PG-TDSON-8-MFG 28.194,-58.293 r270 bottom
R1 "10k 0402 0.1%" RESC1005X40X25ML05T10 61.849,-10.414 r0 bottom
R2 "10k 0402 0.1%" RESC1005X40X25ML05T10 40.132,-23.749 r180 bottom
R3 "10k 0402 0.1%" RESC1005X40X25ML05T10 27.813,-38.735 r180 top
R4 "10k 0402 0.1%" RESC1005X40X25ML05T10 56.769,-27.178 r90 bottom
R5 "1k 0402 1%" RESC1005X40X25ML05T10 45.339,-27.432 r90 bottom
R6 "1k 0402 1%" RESC1005X40X25ML05T10 46.609,-27.432 r90 bottom
R7 "0.003R 1206 0.5W 1%" CAPC3216X180X55ML20T25 26.924,-55.753 r180 top
R8 "10k 0402 0.1%" RESC1005X40X25ML05T10 34.258,-39.899 r0 top
R9 "1k 0402 1%" RESC1005X40X25ML05T10 27.178,-40.259 r90 top
R10 "1k 0402 1%" RESC1005X40X25ML05T10 35.02,-35.327 r180 top
R11 "10k 0402 0.1%" RESC1005X40X25ML05T10 28.321,-40.259 r270 top
R12 "10k 0402 0.1%" RESC1005X40X25ML05T10 37.56,-37.105 r90 top
R13 "0.003R 1206 0.5W 1%" CAPC3216X180X55ML20T25 34.671,-55.626 r0 top
R14 "1k 0402 1%" RESC1005X40X25ML05T10 44.831,-55.753 r0 top
R15 "10k 0402 0.1%" RESC1005X40X25ML05T10 44.831,-56.896 r180 top
R16 "10k 0402 0.1%" RESC1005X40X25ML05T10 58.928,-60.071 r90 top
R17 "0.003R 1206 0.5W 1%" CAPC3216X180X55ML20T25 50.673,-56.515 r270 top
R18 "10k 0402 0.1%" RESC1005X40X25ML05T10 83.185,-45.593 r270 bottom
R19 "0.003R 1206 0.5W 1%" CAPC3216X180X55ML20T25 80.772,-52.07 r90 bottom
R20 "10k 0402 0.1%" RESC1005X40X25ML05T10 83.947,-53.086 r90 bottom
R21 "10k 0402 0.1%" RESC1005X40X25ML05T10 83.947,-55.372 r90 bottom
R22 "1k 0402 1%" RESC1005X40X25ML05T10 57.785,-58.166 r90 top
R23 "10k 0402 0.1%" RESC1005X40X25ML05T10 58.928,-58.166 r270 top
R24 "10k 0402 0.1%" RESC1005X40X25ML05T10 109.093,-49.276 r90 top
R25 "10k 0402 0.1%" RESC1005X40X25ML05T10 106.175,-56.264 r180 top
R26 "130Ohm 0402 1%" RESC1005X40X25ML05T10 111.128,-60.582 r90 top
R27 "130Ohm 0402 1%" RESC1005X40X25ML05T10 109.731,-60.582 r90 top
R28 "1k 0402 1%" RESC1005X40X25ML05T10 117.403,-55.626 r180 top
R29 "130Ohm 0402 1%" RESC1005X40X25ML05T10 117.403,-54.533 r180 top
R30 "130Ohm 0402 1%" RESC1005X40X25ML05T10 117.403,-53.39 r180 top
R31 "130Ohm 0402 1%" RESC1005X40X25ML05T10 114.982,-49.988 r0 top
R32 "130Ohm 0402 1%" RESC1005X40X25ML05T10 117.403,-52.2 r180 top
R33 "130Ohm 0402 1%" RESC1005X40X25ML05T10 106.807,-58.293 r270 top
R34 "1k 0402 1%" RESC1005X40X25ML05T10 33.147,-6.858 r90 top
R35 "1k 0402 1%" RESC1005X40X25ML05T10 37.846,-6.985 r0 top
R36 "1k 0402 1%" RESC1005X40X25ML05T10 103.534,-20.279 r0 bottom
R37 "10k 0402 0.1%" RESC1005X40X25ML05T10 103.534,-21.422 r180 bottom
R38 "1k 0402 1%" RESC1005X40X25ML05T10 103.567,-22.692 r0 bottom
R39 "0R 0402 1%" RESC1005X40X25ML05T10 83.185,-18.255 r270 bottom
R40 "0R 0402 1%" RESC1005X40X25ML05T10 83.185,-14.605 r270 bottom
R41 "100R 0402 0.1%" RESC1005X40X25ML05T10 127.127,-30.988 r180 top
R42 "100R 0402 0.1%" RESC1005X40X25ML05T10 127.127,-25.146 r180 top
R43 "100R 0402 0.1%" RESC1005X40X25ML05T10 130.556,-25.146 r0 top
R44 "2k26 0402 0.1%" RESC1005X40X25ML05T10 94.014,-50.292 r180 bottom
R45 "100R 0402 0.1%" RESC1005X40X25ML05T10 94.014,-49.149 r180 bottom
R46 "0R 0805 0.5W 1%" RESC2013X65X40LL15T20 13.716,-4.318 r0 bottom
R47 "0R 0805 0.5W 1%" RESC2013X65X40LL15T20 16.51,-38.1 r270 top
R48 "0.003R 1206 0.5W 1%" CAPC3216X180X55ML20T25 18.669,-20.828 r90 bottom
R49 "0.003R 1206 0.5W 1%" CAPC3216X180X55ML20T25 31.369,-51.054 r90 bottom
R50 "0.003R 1206 0.5W 1%" CAPC3216X180X55ML20T25 7.835,-5.842 r270 bottom
R51 "0.003R 1206 0.5W 1%" CAPC3216X180X55ML20T25 10.248,-5.842 r270 bottom
R52 "10k 0402 0.1%" RESC1005X40X25ML05T10 18.288,-10.414 r90 top
R53 "4.99R 0402 1%" RESC1005X40X25ML05T10 21.971,-19.685 r180 bottom
R54 "4.99R 0402 1%" RESC1005X40X25ML05T10 21.971,-21.082 r180 bottom
R55 "0.003R 1206 0.5W 1%" CAPC3216X180X55ML20T25 11.811,-10.287 r270 top
R56 "100k 0402 0.1%" RESC1005X40X25ML05T10 18.161,-7.942 r90 top
R57 "10k 0402 0.1%" RESC1005X40X25ML05T10 18.288,-12.446 r90 top
R58 "10k 0402 0.1%" RESC1005X40X25ML05T10 22.479,-5.682 r90 top
R59 "0.003R 1206 0.5W 1%" CAPC3216X180X55ML20T25 21.59,-58.547 r0 bottom
R60 "1R 0805 0.5W 1%" RESC2013X65X40LL15T20 21.844,-32.639 r90 bottom
R61 "10R 0402 0.1%" RESC1005X40X25ML05T10 22.098,-62.484 r90 bottom
R62 "10R 0402 0.1%" RESC1005X40X25ML05T10 20.955,-62.484 r90 bottom
R63 "10k 0402 0.1%" RESC1005X40X25ML05T10 25.273,-10.922 r0 top
R64 "33k 0402 1%" RESC1005X40X25ML05T10 26.035,-42.672 r180 bottom
R65 "10R 0402 0.1%" RESC1005X40X25ML05T10 26.924,-32.893 r90 bottom
R66 "15k 0402 0.1%" RESC1005X40X25ML05T10 27.432,-41.656 r180 bottom
R67 "383k 0402 1%" RESC1005X40X25ML05T10 25.019,-32.893 r90 bottom
R68 "191k 0402 1%" RESC1005X40X25ML05T10 28.415,-33.401 r0 bottom
R69 "220k 0402 1%" RESC1005X40X25ML05T10 24.13,-32.004 r90 bottom
R70 "30.1k 0402 1%" RESC1005X40X25ML05T10 28.194,-36.83 r0 bottom
R71 "40.2k 0402 1%" RESC1005X40X25ML05T10 28.067,-40.259 r0 bottom
R72 "10k 0402 0.1%" RESC1005X40X25ML05T10 57.256,-34.438 r90 bottom
R73 "10k 0402 0.1%" RESC1005X40X25ML05T10 28.702,-4.097 r270 top
R74 "73k2 0402 1%" RESC1005X40X25ML05T10 65.405,-48.611 r90 bottom
R75 "10k 0402 0.1%" RESC1005X40X25ML05T10 19.939,-10.16 r90 bottom
R76 "10k 0402 0.1%" RESC1005X40X25ML05T10 66.421,-48.611 r270 bottom
R77 "56k 0402 0.1%" RESC1005X40X25ML05T10 69.055,-38.227 r0 bottom
R78 "10k 0402 0.1%" RESC1005X40X25ML05T10 69.088,-39.243 r180 bottom
R79 "47k 0402 0.1%" RESC1005X40X25ML05T10 51.181,-31.75 r0 bottom
R80 "10k 0402 0.1%" RESC1005X40X25ML05T10 51.181,-32.639 r180 bottom
R81 "10k 0402 0.1%" RESC1005X40X25ML05T10 59.817,-26.162 r0 bottom
R82 "0R 0402 1%" RESC1005X40X25ML05T10 59.784,-27.051 r0 bottom
RF_PCB1 "Planar Inverted-F Antenna" PCB-k9titb4465gfk1ijwrnj-1 75.468,-12.349 r180 bottom
S1 "PTS647SK70SMTR2N_LFS" PTS647SK70SMTR2NLFS 19.431,-6.096 r180 bottom
U1 "ESP32-S3-WROOM-1-N8" ESP32S3WROOM1N8R2 51.041,-12.499 r180 bottom
U2 "TPS2553DBVR" DBV0006A_M 84.135,-49.198 r270 bottom
U4 "AFE4490RHAR" RHA0040B_V 111.713,-54.66 r180 top
U5 "Simcom SIM800C" SIM800C 100.979,-20.238 r180 bottom
U6 "MFF2" SON127P600X95_HS-9N 101.154,-40.726 r270 bottom
U7 "INA3221AIRGVR" RGV0016A_V 41.148,-50.673 r90 bottom
U8 "INA3221AIRGVR" RGV0016A_V 57.258,-52.197 r90 bottom
U9 "ADS1110A0IDBVR" TI-DBV6_M 90.424,-49.276 r180 bottom
U11 "BQ25730RSNR" QFN40P400X400X80-33N-D 23.749,-38.1 r270 bottom
U12 "TPS563231DRLR" FP-DRL0006A-MFG 68.602,-49.776 r180 bottom
U13 "TPS563231DRLR" FP-DRL0006A-MFG 70.415,-35.861 r270 bottom
U14 "TPS563231DRLR" FP-DRL0006A-MFG 49.276,-34.417 r90 bottom
U15 "SPX3819M5-L-3-3/TR" SOT-23-5_L3.0-W1.7-P0.95-LS2.8-BR 103.124,-53.721 r180 top
Y1 "ABM3-8.000MHZ-D2Y-T" FP-ABM3-MFG 112.649,-63.754 r180 top

## Footprints (in the part's own frame and the unit in brackets; to place one, negate y for a bottom-side part, rotate by r counter-clockwise, add the part's x,y. Pads: shape width x height; smd on the part's side, far side on the other; paste and mask are expansions set on the pad)
1042240820 [mm]
  rect 1.1x1 smd: 1(-2.02,6.063) 2(1.62,6.063)
  rect 1x2.3 smd: G1(-5.3,-5.063) G2(-5.3,2.137) G3(4.9,2.137) G4(4.9,-5.063)
  rect 1x0.8 smd: S1(4.7,-2.212) S2(4.7,-1.012) S3(-5.1,-2.212) S4(4.7,0.188) S5(-5.1,-1.012) S6(-5.1,0.188)
  silkscreen extent -5.07,-6.56 5.8,5.74, body extent -5.18,-6.27 5.18,6.28, height 1.11
62201021121 [mm] "Pin Header, pitch 1.27 mm, THT, Vertical, dual row, 10p"
  rrect50% 0.95x0.95 hole 0.65: 1(-2.54,-0.635)
  round 0.95 hole 0.65: 2(-2.54,0.635) 3(-1.27,-0.635) 4(-1.27,0.635) 5(0,-0.635) 6(0,0.635) 7(1.27,-0.635) 8(1.27,0.635) 9(2.54,-0.635) 10(2.54,0.635)
  silkscreen extent -3.93,-1.78 3.32,1.78, body extent -3.17,-1.7 3.18,1.7, height 5.33
691311400102 [mm] "7.62 mm - Closed Vertical PCB Header - 2p"
  rrect50% 2.4x2.4 hole 1.6: 1(-3.81,-0.45)
  round 2.4 hole 1.6: 2(3.81,-0.45)
  silkscreen extent -7.61,-4.25 7.61,4.25, body extent -7.62,-4.26 7.62,4.24, height 12.05
AUDIO-TH_PJ-612 [mm]
  oval 1.6x4.1 hole 0.8 slot 3.3 at 90 deg: 3(6.5,-0.5) 6(-6.5,2.5)
  oval 1.6x4.1 hole 0.8 slot 3.3 at 135 deg rot 45: 4(-4.6,-4.6)
  oval 4.1x1.6 hole 0.8 slot 3.3 at 0 deg: 5(2.5,-6.5) 7(-0.5,6.5)
  silkscreen extent -7.9,-7.9 7.9,7.9, body extent -8,-8 8,8, height 31.3
BUZZER-12MM-NS [mil] "BUZZER-12MM-NS"
  round 54 hole 36: 1(128,0) 2(-127.95,0)
  body extent -233,-233 233,233, height 335
CAPC1005X55X25NL5T10 [mm] "Chip Capacitor, 2-Leads, Body 1.05x0.55mm, IPC Medium Density"
  rect 0.66x0.62 smd: 1(-0.44,0) 2(0.44,0)
  body extent -0.53,-0.28 0.53,0.28, height 0.55
CAPC3216X180X55ML20T25 [mm] "CAPC3216X180X55ML20T25"
  rect 1.55x1.9 smd: 1(-1.475,0) 2(1.475,0)
  silkscreen extent -0.3,-0.85 0.3,0.85, body extent -1.7,-0.9 1.7,0.9, height 1.8
CONN-TH_4P-P5.08_KF2EDGVC-5.08-4P [mm]
  round 2.8 hole 1.8: 1(-7.62,0) 2(-2.54,0) 3(2.54,0) 4(7.62,0)
  silkscreen extent -10.64,-4.55 10.64,3.85
DBV0006A_M [mm] "SOT23, 6-Leads, Body 3.05x1.75mm, Pitch 0.95mm, IPC Low Density"
  rrect15% 1.2x0.65 smd: 1(-1.475,0.95) 2(-1.475,0) 3(-1.475,-0.95) 4(1.475,-0.95) 5(1.475,0) 6(1.475,0.95)
  silkscreen extent -1.6,-1.55 0.5,1.95, body extent -1.42,-1.46 1.42,1.46, height 1.11
DIOD-SOD123_V [mm] "SMD, 2-Leads, Body 2.7x1.55mm"
  rect 0.9x0.95 smd: 1(-1.575,0) 2(1.575,0)
  silkscreen extent -0.86,-0.77 2.52,0.77, body extent -1.35,-0.77 1.35,0.77, height 1.41
DIOD-SOT323-3_V [mm] "SOT323, 3-Leads, Body 2.2x1.35mm, Pitch 0.65mm"
  rect 0.9x0.7 smd: 1(-0.95,0.65) 2(-0.95,-0.65) 3(0.95,0)
  silkscreen extent -1.07,-1.1 0.67,1.68, body extent -1.1,-1.1 1.1,1.1, height 1.07
"DPAK IPD90P03P404ATMA1" [mm]
  rect 3.6x2 smd: 1(-4.4,2.29) 3(-4.4,-2.29)
  rect 6.2x5.8 smd: 2(2.8,0)
  silkscreen extent -4.52,-3.27 -0.45,3.77, body extent -4.57,-3.27 5.37,3.27, height 2.29
ESP32S3WROOM1N8R2 [mm]
  rect 1.5x0.9 smd: 1(-8.75,5.26) 2(-8.75,3.99) 3(-8.75,2.72) 4(-8.75,1.45) 5(-8.75,0.18) 6(-8.75,-1.09) 7(-8.75,-2.36) 8(-8.75,-3.63) 9(-8.75,-4.9) 10(-8.75,-6.17) 11(-8.75,-7.44) 12(-8.75,-8.71) 13(-8.75,-9.98) 14(-8.75,-11.25) 27(8.75,-11.25) 28(8.75,-9.98) 29(8.75,-8.71) 30(8.75,-7.44) 31(8.75,-6.17) 32(8.75,-4.9) 33(8.75,-3.63) 34(8.75,-2.36) 35(8.75,-1.09) 36(8.75,0.18) 37(8.75,1.45) 38(8.75,2.72) 39(8.75,3.99) 40(8.75,5.26)
  rect 0.9x1.5 smd: 15(-6.985,-12.5) 16(-5.715,-12.5) 17(-4.445,-12.5) 18(-3.175,-12.5) 19(-1.905,-12.5) 20(-0.635,-12.5) 21(0.635,-12.5) 22(1.905,-12.5) 23(3.175,-12.5) 24(4.445,-12.5) 25(5.715,-12.5) 26(6.985,-12.5)
  rect 0.9x0.9 smd: 41(-1.5,-2.46) 42(-1.5,-1.06) 43(-2.9,-1.06) 44(-2.9,-2.46) 45(-2.9,-3.86) 46(-1.5,-3.86) 47(-0.1,-3.86) 48(-0.1,-2.46) 49(-0.1,-1.06)
  silkscreen extent -10.1,5.35 9,12.75, body extent -9,-12.75 9,12.75, height 2.7
FP-2-5747706-0-MFG [mil]
  rect 62.65x62.65 hole 41 paste-99999 mask+0: 1(216,56)
  round 62.65 hole 41 paste-99999 mask+0: 2(108,56) 3(0,56) 4(-108,56) 5(-216,56) 6(162,-56) 7(54,-56) 8(-54,-56) 9(-162,-56)
  round 183.99 hole 121 paste-99999 mask+0: 10(-492,0) 11(492,0)
  silkscreen extent -614,-255 614,284, body extent -606,-248 606,248, height 494
FP-318-08-IPC_A [mm]
  rect 1.824x0.618 smd paste+0 mask+0: 1(-0.96,0.95)
  rrect100% 1.824x0.618 smd paste+0 mask+0: 2(-0.96,-0.95) 3(0.96,0)
  silkscreen extent -0.65,-1.45 0.65,1.45, body extent -1.2,-1.45 1.2,1.45, height 1.11
FP-ABM3-MFG [mm]
  rect 1.9x2.4 smd paste+0 mask+0: 1(-2.05,0) 2(2.05,0)
  silkscreen extent -2.6,-1.7 2.6,1.7, body extent -2.5,-1.6 2.5,1.6, height 1.3
FP-B4B-XH-A_LF_SN-MFG [mm]
  rect 1.4x1.4 hole 0.9 paste-2539.97 mask+0: 1(3.75,-0.525)
  round 1.4 hole 0.9 paste-2539.97 mask+0: 2(1.25,-0.525) 3(-1.25,-0.525) 4(-3.75,-0.525)
  silkscreen extent -6.2,-2.88 6.87,2.88, body extent -6.2,-2.88 6.2,2.88, height 7
FP-CC1206-FD-MFG [mm]
  rect 1x1.8 smd paste+0 mask+0: 1(-1.5,0) 2(1.5,0)
  silkscreen extent -0.63,-0.95 0.63,0.95, body extent -1.6,-0.8 1.6,0.8, height 1.9
FP-DEM8045C-MFG [mm]
  rect 1.75x3 smd paste+0 mask+0: 1(-3.375,0) 2(3.375,0)
  silkscreen extent -4.95,-4.15 4.15,4.15, body extent -4,-4 4,4, height 4.5
FP-DRL0006A-MFG [mm]
  rrect33% 0.67x0.3 smd paste+0 mask+0: 1(-0.74,0.5) 2(-0.74,0) 3(-0.74,-0.5) 4(0.74,-0.5) 5(0.74,0) 6(0.74,0.5)
  silkscreen extent -1.9,-1.05 0.65,1.05, body extent -0.8,-0.8 0.8,0.8, height 0.6
FP-GRM21B-0_2-e0_2_0_7-MFG [mm]
  rect 0.7x1.3 smd paste+0 mask+0: 1(-0.95,0) 2(0.95,0)
  silkscreen extent -0.23,-0.72 0.23,0.72, body extent -1,-0.63 1,0.63, height 1.45
FP-GRM188-0_2-IPC_B [mm]
  rect 1.105x1.006 smd paste+0 mask+0: 1(-0.701,0) 2(0.701,0)
  silkscreen extent -1.25,-0.9 1.25,0.9, body extent -0.8,-0.4 0.8,0.4, height 1
FP-PG-TDSON-8-MFG [mm]
  rect 3.2x1.1 smd paste-1000 mask-1000: 1-2-3(-0.715,-2.775)
  rect 0.5x1.1 smd paste-1000 mask+0: 4(1.905,-2.775)
  rect 4.41x4.55 smd paste-1000 mask-1000: 5-6-7-8(0,1.05)
  silkscreen extent -2.78,-4.07 2.78,3.08, body extent -2.7,-3.08 2.7,3.08, height 1.1
FP-PG-TO252-3-MFG [mm]
  rect 1.5x2.5 smd paste+0 mask+0: 1(-2.3,-4.575) 3(2.3,-4.575)
  rect 7x7 smd paste+0 mask+0: 4(0,2.325)
  silkscreen extent -3.36,-2.28 3.36,-1.55, body extent -3.27,-5.21 3.27,5.21, height 2.38
FP-SMAJ-CA-MFG [mm]
  rect 2.1x1.8 smd paste+0 mask+0: 1(-2.2,0) 2(2.2,0)
  silkscreen extent -2.3,-1.4 2.3,1.4, body extent -2.55,-1.34 2.55,1.33, height 2.29
INDPM135125X650N [mm]
  rect 4x4.9 smd: 1(-5.5,0) 2(5.5,0)
  silkscreen extent -6.75,-6.25 6.75,6.25, body extent -6.75,-6.25 6.75,6.25, height 6.5
LESD5D50CT1G [mm]
  rect 0.48x0.4 smd: 1(-0.66,0) 2(0.66,0)
  silkscreen extent -1.15,-0.4 0.6,0.4, body extent -0.8,-0.4 0.8,0.4, height 0.6
MF06A_N [mm]
  rect 1.1x0.65 smd: 1(-1.2,0.95) 2(-1.2,0) 3(-1.2,-0.95) 4(1.2,-0.95) 5(1.2,0) 6(1.2,0.95)
  silkscreen extent -1.32,-1.5 0.25,1.95, body extent -0.83,-1.49 0.83,1.5, height 1.22
NETTIE_SMD [mm]
  rect 0.2x0.2 smd mask+0: 1(-1.016,0) 2(1.016,0)
  Top Layer region: -1.016,0.1 1.016,0.1 1.016,-0.1 -1.016,-0.1
NXP-SOT23-3_V [mm] "SOT23, 3-Leads, Body 1.3x2.9mm, Pitch 0.95mm"
  rect 0.6x0.7 smd paste-0.05: 1(0.95,1) 2(-0.95,1) 3(0,-1)
  silkscreen extent -1.45,-0.65 1.45,1.79, body extent -1.45,-0.65 1.45,0.65, height 1.1
ONSC-SOD-123-2-425-04_V [mm] "SOD, 2-Leads, Body 2.69x1.6mm"
  rect 0.91x1.22 smd: 1(-1.635,0) 2(1.635,0)
  silkscreen extent -1.76,-0.8 0.78,1.28, body extent -1.35,-0.8 1.35,0.8, height 1.35
ONSC-SOD-923-2-514AB-01_V [mm] "SOD, 2-Leads, Body 0.8x0.6mm"
  rect 0.36x0.25 smd: 1(-0.42,0) 2(0.42,0)
  silkscreen extent -0.47,0.48 -0.37,0.57, body extent -0.4,-0.3 0.4,0.3, height 0.4
PCB-37z8hw1ej4f71bosen9e-1 [mm] "Low Profile Socket Strip, 2x3 Pins, Vertical, 2.54mm Pitch, Female"
  rect 1.4x1.4 hole 0.762: 1(0,0)
  round 1.4 hole 0.762: 2(2.54,0) 3(0,-2.54) 4(2.54,-2.54) 5(0,-5.08) 6(2.54,-5.08)
  silkscreen extent -1.27,-6.48 3.81,1.4, body extent -1.21,-6.35 3.75,1.27, height 4.57
PCB-h4cyb3wxd4gf7j132tzl-1 [mm]
  rect 2.5x2.5 hole 1.8: 1(-2.54,0)
  round 2.032 hole 1.27: 2(2.54,0)
  silkscreen extent -6.1,-4.45 5.97,4.19, body extent -5.78,-11.94 5.78,3.67, height 21.08
PCB-k9titb4465gfk1ijwrnj-1 [mil]
  round 20 smd mask+4: 1(-315,35) 2(-35,35)
  Top Layer region: 0,0 -78.74,0 -78.74,472.44 0,472.44
  Top Layer region: 0,393.7 -2283.46,393.7 -2283.46,472.44 0,472.44
  Top Layer region: -275.59,0 -354.33,0 -354.33,472.44 -275.59,472.44
  Top Layer region: -35.65,157.48 -1318.92,157.48 -1318.92,275.59 -35.65,275.59
  Top Layer region: -2220.87,164.33 -2283.46,164.33 -2283.46,471.42 -2220.87,471.42
POWERDI3333-8_MFG [mm] "Recommended Land Pattern"
  rect 0.42x0.7 smd: 1(-0.975,-1.5) 2(-0.325,-1.5) 3(0.325,-1.5) 4(0.975,-1.5)
  round 1.519 smd: 5-6-7-8(-0.341,0.444)
  Top Layer region: -1.185,1.85 -0.765,1.85 -0.765,1.31 -0.535,1.31 -0.535,1.85 -0.115,1.85 -0.115,1.31 0.115,1.31 0.115,1.85 0.535,1.85 0.535,1.31 0.765,1.31 0.765,1.85 1.185,1.85 1.185,-0.4 -1.185,-0.4 -1.185,1.85
  silkscreen extent -1.68,-2.62 1.68,1.68, body extent -1.65,-1.63 1.65,1.67, height 0.85
PTS647SK70SMTR2NLFS [mm]
  rect 1.55x1 smd: 1(-2.625,1.6) 2(2.625,1.6) 3(-2.625,-1.6) 4(2.625,-1.6)
  silkscreen extent -3.9,-2.25 2.25,2.25, body extent -3.25,-2.25 3.25,2.25, height 7
QFN40P400X400X80-33N-D [mm]
  rect 0.75x0.2 smd: 1(-2,1.4) 2(-2,1) 3(-2,0.6) 4(-2,0.2) 5(-2,-0.2) 6(-2,-0.6) 7(-2,-1) 8(-2,-1.4) 17(2,-1.4) 18(2,-1) 19(2,-0.6) 20(2,-0.2) 21(2,0.2) 22(2,0.6) 23(2,1) 24(2,1.4)
  rect 0.2x0.75 smd: 9(-1.4,-2) 10(-1,-2) 11(-0.6,-2) 12(-0.2,-2) 13(0.2,-2) 14(0.6,-2) 15(1,-2) 16(1.4,-2) 25(1.4,2) 26(1,2) 27(0.6,2) 28(0.2,2) 29(-0.2,2) 30(-0.6,2) 31(-1,2) 32(-1.4,2)
  rect 2.9x2.9 smd: 33(0,0)
  silkscreen extent -2.47,1.9 -2.28,2.1, body extent -2,-2 2,2, height 0.8
RESC1005X40X25ML05T10 [mm] "Chip Resistor, 2-Leads, Body 1.00x0.50mm, IPC Low Density"
  rect 0.7x0.65 smd: 1(-0.475,0) 2(0.475,0)
  body extent -0.53,-0.27 0.53,0.28, height 0.4
RESC2013X65X40LL15T20 [mm] "Chip Resistor, 2-Leads, Body 2.00x1.30mm, IPC High Density"
  rect 0.9x1.35 smd: 1(-0.775,0) 2(0.775,0)
  body extent -1.07,-0.72 1.07,0.72, height 0.65
RGV0016A_V [mm] "QFN, 16-Leads, Body 4x4mm, Pitch 0.65mm, Thermal Pad 2.16x2.16mm, TI Recommended"
  rrect33% 0.75x0.3 smd: 1(-1.825,0.975) 2(-1.825,0.325) 3(-1.825,-0.325) 4(-1.825,-0.975) 9(1.825,-0.975) 10(1.825,-0.325) 11(1.825,0.325) 12(1.825,0.975)
  rrect33% 0.3x0.75 smd: 5(-0.975,-1.825) 6(-0.325,-1.825) 7(0.325,-1.825) 8(0.975,-1.825) 13(0.975,1.825) 14(0.325,1.825) 15(-0.325,1.825) 16(-0.975,1.825)
  rrect11% 0.939x0.939 on Bottom Paste: 17(-0.57,-0.57) 17(-0.57,0.57) 17(0.57,-0.57) 17(0.57,0.57)
  rrect5% 2.1x2.1 smd paste-1.08: 17(0,0)
  silkscreen extent -2.22,-2.22 2.22,2.22, body extent -2.07,-2.07 2.07,2.07, height 1.01
RHA0040B_V [mm] "QFN, 40-Leads, Body 6x6mm, Pitch 0.5mm, Thermal Pad 4.15 x 4.15mm, TI Recommended"
  rrect43% 0.6x0.23 smd mask+0.07: 1(-2.9,2.25) 2(-2.9,1.75) 3(-2.9,1.25) 4(-2.9,0.75) 5(-2.9,0.25) 6(-2.9,-0.25) 7(-2.9,-0.75) 8(-2.9,-1.25) 9(-2.9,-1.75) 10(-2.9,-2.25) 21(2.9,-2.25) 22(2.9,-1.75) 23(2.9,-1.25) 24(2.9,-0.75) 25(2.9,-0.25) 26(2.9,0.25) 27(2.9,0.75) 28(2.9,1.25) 29(2.9,1.75) 30(2.9,2.25)
  rrect43% 0.23x0.6 smd mask+0.07: 11(-2.25,-2.9) 12(-1.75,-2.9) 13(-1.25,-2.9) 14(-0.75,-2.9) 15(-0.25,-2.9) 16(0.25,-2.9) 17(0.75,-2.9) 18(1.25,-2.9) 19(1.75,-2.9) 20(2.25,-2.9) 31(2.25,2.9) 32(1.75,2.9) 33(1.25,2.9) 34(0.75,2.9) 35(0.25,2.9) 36(-0.25,2.9) 37(-0.75,2.9) 38(-1.25,2.9) 39(-1.75,2.9) 40(-2.25,2.9)
  rrect2% 4.15x4.15 smd paste-2.1: 41(0,0)
  silkscreen extent -3.22,-3.22 3.22,3.22, body extent -3.08,-3.08 3.08,3.08, height 1.01
SHDR2W85P0X381_1X2_850X700X935P [mm]
  rect 2.1x2.1 hole 1.4: 1(0,0)
  round 2.1 hole 1.4: 2(3.81,0)
  silkscreen extent -2.34,-3.05 6.46,4.15, body extent -2.34,-3.5 6.15,3.5, height 9.35
SIM800C [mm]
  oval 1.8x0.6 smd: 1(0,0) 2(0,-1.1) 3(0,-2.2) 4(0,-3.3) 5(0,-4.4) 6(0,-5.5) 7(0,-6.6) 8(0,-7.7) 9(0,-8.8) 10(0,-9.9) 11(0,-11) 12(0,-12.1) 22(15.7,-12.1) 23(15.7,-11) 24(15.7,-9.9) 25(15.7,-8.8) 26(15.7,-7.7) 27(15.7,-6.6) 28(15.7,-5.5) 29(15.7,-4.4) 30(15.7,-3.3) 31(15.7,-2.2) 32(15.7,-1.1) 33(15.7,0)
  oval 0.6x1.8 smd: 13(3.45,-14.85) 14(4.55,-14.85) 15(5.65,-14.85) 16(6.75,-14.85) 17(7.85,-14.85) 18(8.95,-14.85) 19(10.05,-14.85) 20(11.15,-14.85) 21(12.25,-14.85) 34(12.25,2.75) 35(11.15,2.75) 36(10.05,2.75) 37(8.95,2.75) 38(7.85,2.75) 39(6.75,2.75) 40(5.65,2.75) 41(4.55,2.75) 42(3.45,2.75)
  Keep-Out Layer pour cut-out: 12.5,1.38 14.65,1.38 14.65,-3.57 12.5,-3.57
  silkscreen extent -1.45,-15.25 16.2,3.25, body extent 0,-14.85 15.7,2.75, height 2.3
SON127P600X95_HS-9N [mm]
  rect 1.976x0.5 smd: 1(-3.183,1.905) 2(-3.183,0.635) 3(-3.183,-0.635) 4(-3.183,-1.905) 5(3.183,-1.905) 6(3.183,-0.635) 7(3.183,0.635) 8(3.183,1.905)
  rect 2.77x3.9 smd paste-1.385: 9(0,0)
  silkscreen extent -3.67,-2.73 3.22,2.77, body extent -3.08,-2.58 3.08,2.58, height 0.95
SOT65P210X110-3N [mm]
  rect 1x0.5 smd: 1(-1,0.65) 2(-1,-0.65) 3(1,0)
  silkscreen extent -1.5,-1 0.15,1.15, body extent -1.1,-1.1 1.1,1.1, height 1.1
SOT95P237X112-3N [mm]
  rect 1.3x0.6 smd: 1(-1.05,0.95) 2(-1.05,-0.95) 3(1.05,0)
  silkscreen extent -1.7,-1.46 0.05,1.5, body extent -1.18,-1.46 1.18,1.46, height 1.12
SOT95P285X140-6N [mm]
  rect 1.15x0.6 smd: 1(-1.3,0.95) 2(-1.3,0) 3(-1.3,-0.95) 4(1.3,-0.95) 5(1.3,0) 6(1.3,0.95)
  silkscreen extent -1.88,-1.5 0.38,1.6, body extent -1.43,-1.5 1.43,1.5, height 1.4
SOT-23-5_L3.0-W1.7-P0.95-LS2.8-BR [mm]
  rect 1x0.6 smd: 1(1.3,-0.95) 2(1.3,0) 3(1.3,0.95) 4(-1.3,0.95) 5(-1.3,-0.95)
  silkscreen extent -0.9,-1.78 1.65,1.55
TI-DBV6_M [mm] "SOT23, 6-Leads, Body 2.9x1.6mm, Pitch 0.95mm, IPC Low Density"
  rect 1.3x0.7 smd: 1(-1.2,0.95) 2(-1.2,0) 3(-1.2,-0.95) 4(1.2,-0.95) 5(1.2,0) 6(1.2,0.95)
  silkscreen extent -1.33,-1.55 0.15,1.97, body extent -0.87,-1.52 0.87,1.53, height 1.45
TYPE-C-TH_16PLC-H10.0 [mm]
  rect 0.62x0.62 hole 0.42: A1(-3.25,0.7) A4(-2.3,0.7) A5(-1.35,0.7) A6(-0.45,0.7) A7(0.45,0.7) A8(1.35,0.7) A9(2.3,0.7) A12(3.25,0.7) B1(3.25,-0.7) B4(2.3,-0.7) B5(1.35,-0.7) B6(0.45,-0.7) B7(-0.45,-0.7) B8(-1.35,-0.7) B9(-2.3,-0.7) B12(-3.25,-0.7)
  oval 2x0.9 hole 0.5 slot 1.45 at 0 deg: A2(-2,1.93) A10(2,1.93) B2(2,-1.93) B10(-2,-1.93)
  silkscreen extent -4.75,-1.9 4.75,1.9

## Part data
BUZ1: library part CMP-581a9557be5887dd-1, "Audio Buzzer Magnetic 3Vo-p 5Vo-p 70mA 3.5Vo-p 85dB Through Hole Pin Tray", LCSC Part=C252915, Manufacturer Part Number=CMT-1285C-035, Manufacturer Part Number 2=GMC1205YA-16R2048, LCSC_PN=C252915, Lead-Free Status="Lead Free", Mounting Style="Through Hole", Octopart URL=https://octopart.com/cmt-1285c-035-cui-71811876, OctopartID=581a9557be5887dd, RoHS=Compliant
C1 C13 C40 C56 C61 C96 C97: library part CMP-1662-00020-1, LCSC_PN=C1518208, ComponentLink1Description="Manufacturer URL", ComponentLink1URL=http://www.murata.com/, ComponentLink2Description=Datasheet, ComponentLink2URL=http://psearch.en.murata.com/capacitor/product/GRM155R60J105KE19%23.pdf
C2 C4 C5 C14 C69 C70 C71 C72 C79 C80 C81 C82 C88 C89 C90 C91: library part CMP-1662-00020-1, LCSC_PN=C77000, ComponentLink1Description="Manufacturer URL", ComponentLink1URL=http://www.murata.com/, ComponentLink2Description=Datasheet, ComponentLink2URL=http://psearch.en.murata.com/capacitor/product/GRM155R60J105KE19%23.pdf
C3 C11 C12 C15 C17 C18 C19 C20 C22 C23 C24 C25 C26 C43 C57 C68 C73 C76 C77 C78 C83 C86 C87 C92 C95 C98: library part CMP-1662-00020-1, LCSC_PN=C77020, ComponentLink1Description="Manufacturer URL", ComponentLink1URL=http://www.murata.com/, ComponentLink2Description=Datasheet, ComponentLink2URL=http://psearch.en.murata.com/capacitor/product/GRM155R60J105KE19%23.pdf
C6 C10 C16 C21: library part CMP-1662-00020-1, LCSC_PN=C33149, ComponentLink1Description="Manufacturer URL", ComponentLink1URL=http://www.murata.com/, ComponentLink2Description=Datasheet, ComponentLink2URL=http://psearch.en.murata.com/capacitor/product/GRM155R60J105KE19%23.pdf
C7 C27 C29 C52: library part CMP-1662-00020-1, LCSC_PN=C60133, ComponentLink1Description="Manufacturer URL", ComponentLink1URL=http://www.murata.com/, ComponentLink2Description=Datasheet, ComponentLink2URL=http://psearch.en.murata.com/capacitor/product/GRM155R60J105KE19%23.pdf
C8 C9 C55: library part CMP-1662-00020-1, LCSC_PN=C77002, ComponentLink1Description="Manufacturer URL", ComponentLink1URL=http://www.murata.com/, ComponentLink2Description=Datasheet, ComponentLink2URL=http://psearch.en.murata.com/capacitor/product/GRM155R60J105KE19%23.pdf
C28: library part CMP-1662-00020-1, LCSC_PN=C93920, ComponentLink1Description="Manufacturer URL", ComponentLink1URL=http://www.murata.com/, ComponentLink2Description=Datasheet, ComponentLink2URL=http://psearch.en.murata.com/capacitor/product/GRM155R60J105KE19%23.pdf
C30 C31 C32 C33 C34 C35 C36 C37 C44 C45 C46 C47 C48 C49 C50 C51 C58 C59: library part CMP-06035-048920-1, "Chip Multilayer Ceramic Capacitors for General Purpose, 0805, 10uF, X5R, 15%, 10%, 35V", Capacitance=10uF, Case Code (Imperial)=0805, Case Code (Metric)=2012, Dielectric=X5R, LCSC_PN=C2932476, Max Operating Temperature=85°C, Min Operating Temperature=-55°C, Package Quantity=3000, Tolerance=10%, Voltage Rating=35V, Case/Package=0805, Height=1.25mm, Lead Free="Lead Free", Length=0.079inch, Mount="Surface Mount", Packaging="Tape and Reel", REACH SVHC="No SVHC", Termination=SMD/SMT, Thickness=0.057inch, Voltage Rating (DC)=35V, Weight=0.000335oz, Width=0.049inch
C38 C39: library part CMP-03422-001420-1, "CAP CER 10UF 50V X5R 1206", Capacitance=47nF, Case/Package=1206, Dielectric=X5R, LCSC_PN=C107209, Max Operating Temperature=85°C, Min Operating Temperature=-55°C, Tolerance=10%, Voltage Rating=50V, Halogen Free="Halogen Free", Lead Free="Lead Free", Length=0.126inch, Mount="Surface Mount", Packaging="Tape and Reel", RoHS Compliant=Yes, Thickness=0.075inch, Voltage Rating (DC)=50V, Width=0.063inch
C41 C42: library part CMP-1662-00020-1, LCSC_PN=C113789, ComponentLink1Description="Manufacturer URL", ComponentLink1URL=http://www.murata.com/, ComponentLink2Description=Datasheet, ComponentLink2URL=http://psearch.en.murata.com/capacitor/product/GRM155R60J105KE19%23.pdf
C53 C54: library part CMP-1662-00020-1, LCSC_PN=C106862, ComponentLink1Description="Manufacturer URL", ComponentLink1URL=http://www.murata.com/, ComponentLink2Description=Datasheet, ComponentLink2URL=http://psearch.en.murata.com/capacitor/product/GRM155R60J105KE19%23.pdf
C60: library part CMP-1662-00020-1, LCSC_PN=C307451, ComponentLink1Description="Manufacturer URL", ComponentLink1URL=http://www.murata.com/, ComponentLink2Description=Datasheet, ComponentLink2URL=http://psearch.en.murata.com/capacitor/product/GRM155R60J105KE19%23.pdf
C62: library part CMP-1662-00020-1, LCSC_PN=C86285, ComponentLink1Description="Manufacturer URL", ComponentLink1URL=http://www.murata.com/, ComponentLink2Description=Datasheet, ComponentLink2URL=http://psearch.en.murata.com/capacitor/product/GRM155R60J105KE19%23.pdf
C63 C64 C66: library part CMP-1662-00020-1, LCSC_PN=C281751, ComponentLink1Description="Manufacturer URL", ComponentLink1URL=http://www.murata.com/, ComponentLink2Description=Datasheet, ComponentLink2URL=http://psearch.en.murata.com/capacitor/product/GRM155R60J105KE19%23.pdf
C65: library part CMP-1662-00020-1, LCSC_PN=C107005, ComponentLink1Description="Manufacturer URL", ComponentLink1URL=http://www.murata.com/, ComponentLink2Description=Datasheet, ComponentLink2URL=http://psearch.en.murata.com/capacitor/product/GRM155R60J105KE19%23.pdf
C67: library part CMP-1662-00020-1, LCSC_PN=C23733, ComponentLink1Description="Manufacturer URL", ComponentLink1URL=http://www.murata.com/, ComponentLink2Description=Datasheet, ComponentLink2URL=http://psearch.en.murata.com/capacitor/product/GRM155R60J105KE19%23.pdf
C74 C75 C84 C85 C93 C94: library part CMP-06035-022879-1, LCSC_PN=C91606
D1 D12: "TVS Diode (Bi-directional)", LCSC_PN=C383211, Manufacturer_Name=LRC, Height=0.7mm, Manufacturer_Part_Number=LESD5D5.0CT1G
D2 D3: library part CMP-1063-00120-1, "Transient Voltage Suppressor, Micro-Packaged Diode for ESD Protection, 2-Pin SOD-923, Pb-Free, Tape and Reel", LCSC_PN=C96512, Manufacturer="On Semiconductor", ComponentLink1Description="Manufacturer URL", ComponentLink1URL=http://www.onsemi.com/, ComponentLink2Description=Datasheet, ComponentLink2URL=http://www.onsemi.cn/pub_link/Collateral/ESD9B-D.PDF, ComponentLink3Description="Package Specification", ComponentLink3URL=http://www.onsemi.com/pub_link/Collateral/514AB.PDF, DatasheetVersion="Rev. 2", Direction=Bidirectional, IR Max (uA)=1, Mounting Technology="Surface Mount", Number of Lines=1, PackageDescription="2-Pin SOD, Body 0.8 x 0.6 mm", PackageReference=SOD-923-2-514AB-01, PackageVersion="Rev. C, 03/2011", Packing="Tape and Reel", PartNumber=ESD9B3.3ST5G, RoHS=Pb-Free, V(BR) Min (V)=5, VRWM Max (V)=3.3
D4 D5 D6 D7: "Diode", LCSC_PN=C93035, Manufacturer_Name="Diodes Inc.", Mouser Part Number=621-BAV99W-F, Arrow Part Number=BAV99W-7-F, Arrow Price/Stock=https://www.arrow.com/en/products/bav99w-7-f/diodes-incorporated?region=europe, Datasheet Link=https://www.diodes.com/assets/Datasheets/ds30045.pdf, Height=1.1mm, Manufacturer_Part_Number=BAV99W-7-F, Mouser Price/Stock=https://www.mouser.co.uk/ProductDetail/Diodes-Incorporated/BAV99W-7-F?qs=KrBKXozF1ElcNxS3QKF7wg%3D%3D
D8: library part CMP-1060-00573-1, "Zener Voltage Regulator, 500 mW, 2-Pin SOD-123, Pb-Free, Tape and Reel", LCSC_PN=C2759896, Manufacturer="On Semiconductor", ComponentLink1Description="Manufacturer URL", ComponentLink1URL=http://www.onsemi.com/, ComponentLink2Description=Datasheet, ComponentLink2URL=http://www.onsemi.com/pub_link/Collateral/MMSZ5221BT1-D.PDF, ComponentLink3Description="Package Specification", ComponentLink3URL=http://www.onsemi.com/pub_link/Collateral/425-04.PDF, DatasheetVersion="Rev. 12", Mounting Technology="Surface Mount", P Max (W)=0.5, PackageDescription="2-Pin SOD, Body 1.6 x 2.69 mm", PackageReference=SOD-123-2-425-04, PackageVersion="Rev. G, 10/2009", Packing="Tape and Reel", PartNumber=MMSZ5231BT1G, RoHS=Pb-Free, VZ Typ (V)=5.1
D9: library part CMP-924f5b40f9684d88-1, "ESDA Series 5 Channel 6.1 V 50 pF SMT Uni Directional Transil Array - SOT-23-6L", Breakdown Voltage="7.20 V", Case/Package=SOT-23, LCSC Part=C6650, LCSC_PN=C2827672, Operating Voltage="6.10 V", Power Rating="100 W", Lead-Free Status="Lead Free", Lifecycle Status=Active, Manufacturer Part Number=ESDA6V1-5SC6, Mounting Style="Surface Mount", Number of Pins=6, Octopart URL=http://octopart.com/esda6v1-5sc6-stmicroelectronics-347713, OctopartID=924f5b40f9684d88, Packaging="Tape & Reel (TR), Cut Tape (CT)", REACH SVHC Compliance="No SVHC", RoHS=Compliant, Size-Height="1.45 mm", Size-Length="3.05 mm", Size-Width="1.75 mm", TME=ESDA6V1-5SC6, Voltage Rating (DC)="6.10 V"